# Altium PCB acqboard 3.0.PcbDoc (part 1 of 4)
Units mil, origin at the board's own origin, x right, y up, seen from the top; angles counter-clockwise.
Board outline 6000 x 4000 mil, 4 copper layers (Top Layer, Internal Plane 1, Internal Plane 2, Bottom Layer); 450 components, 328 nets, 1980 pads, 745 vias.
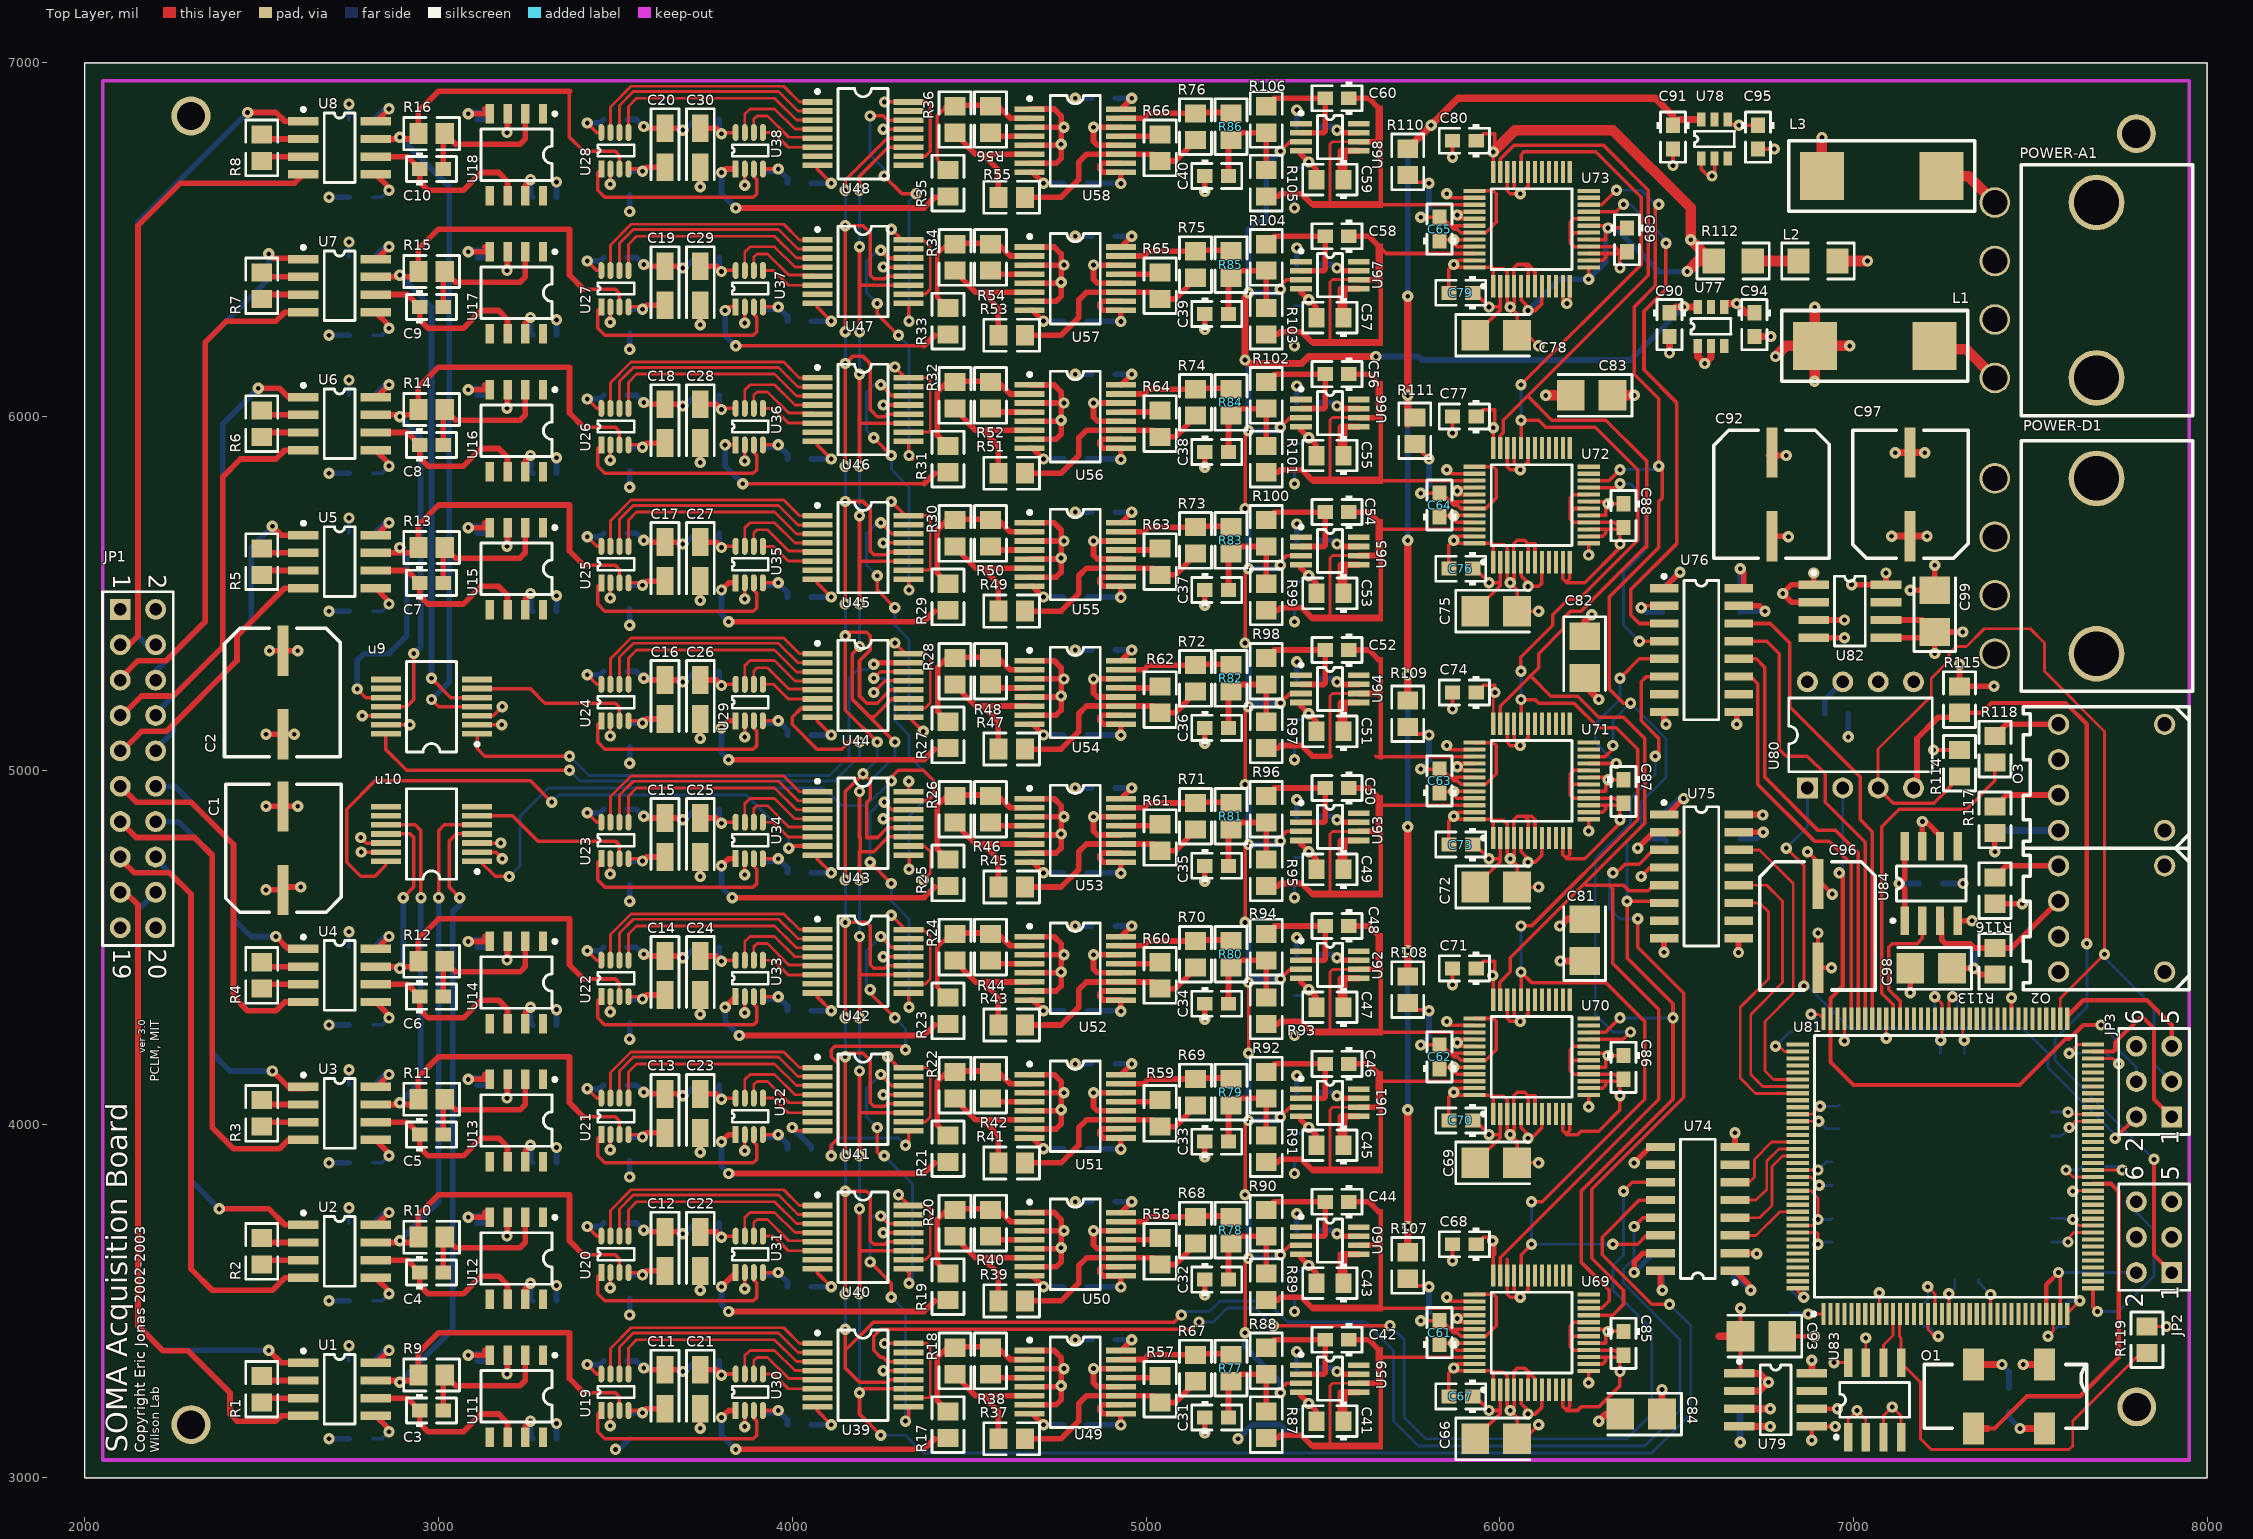
[diagram p0: Top Layer view]
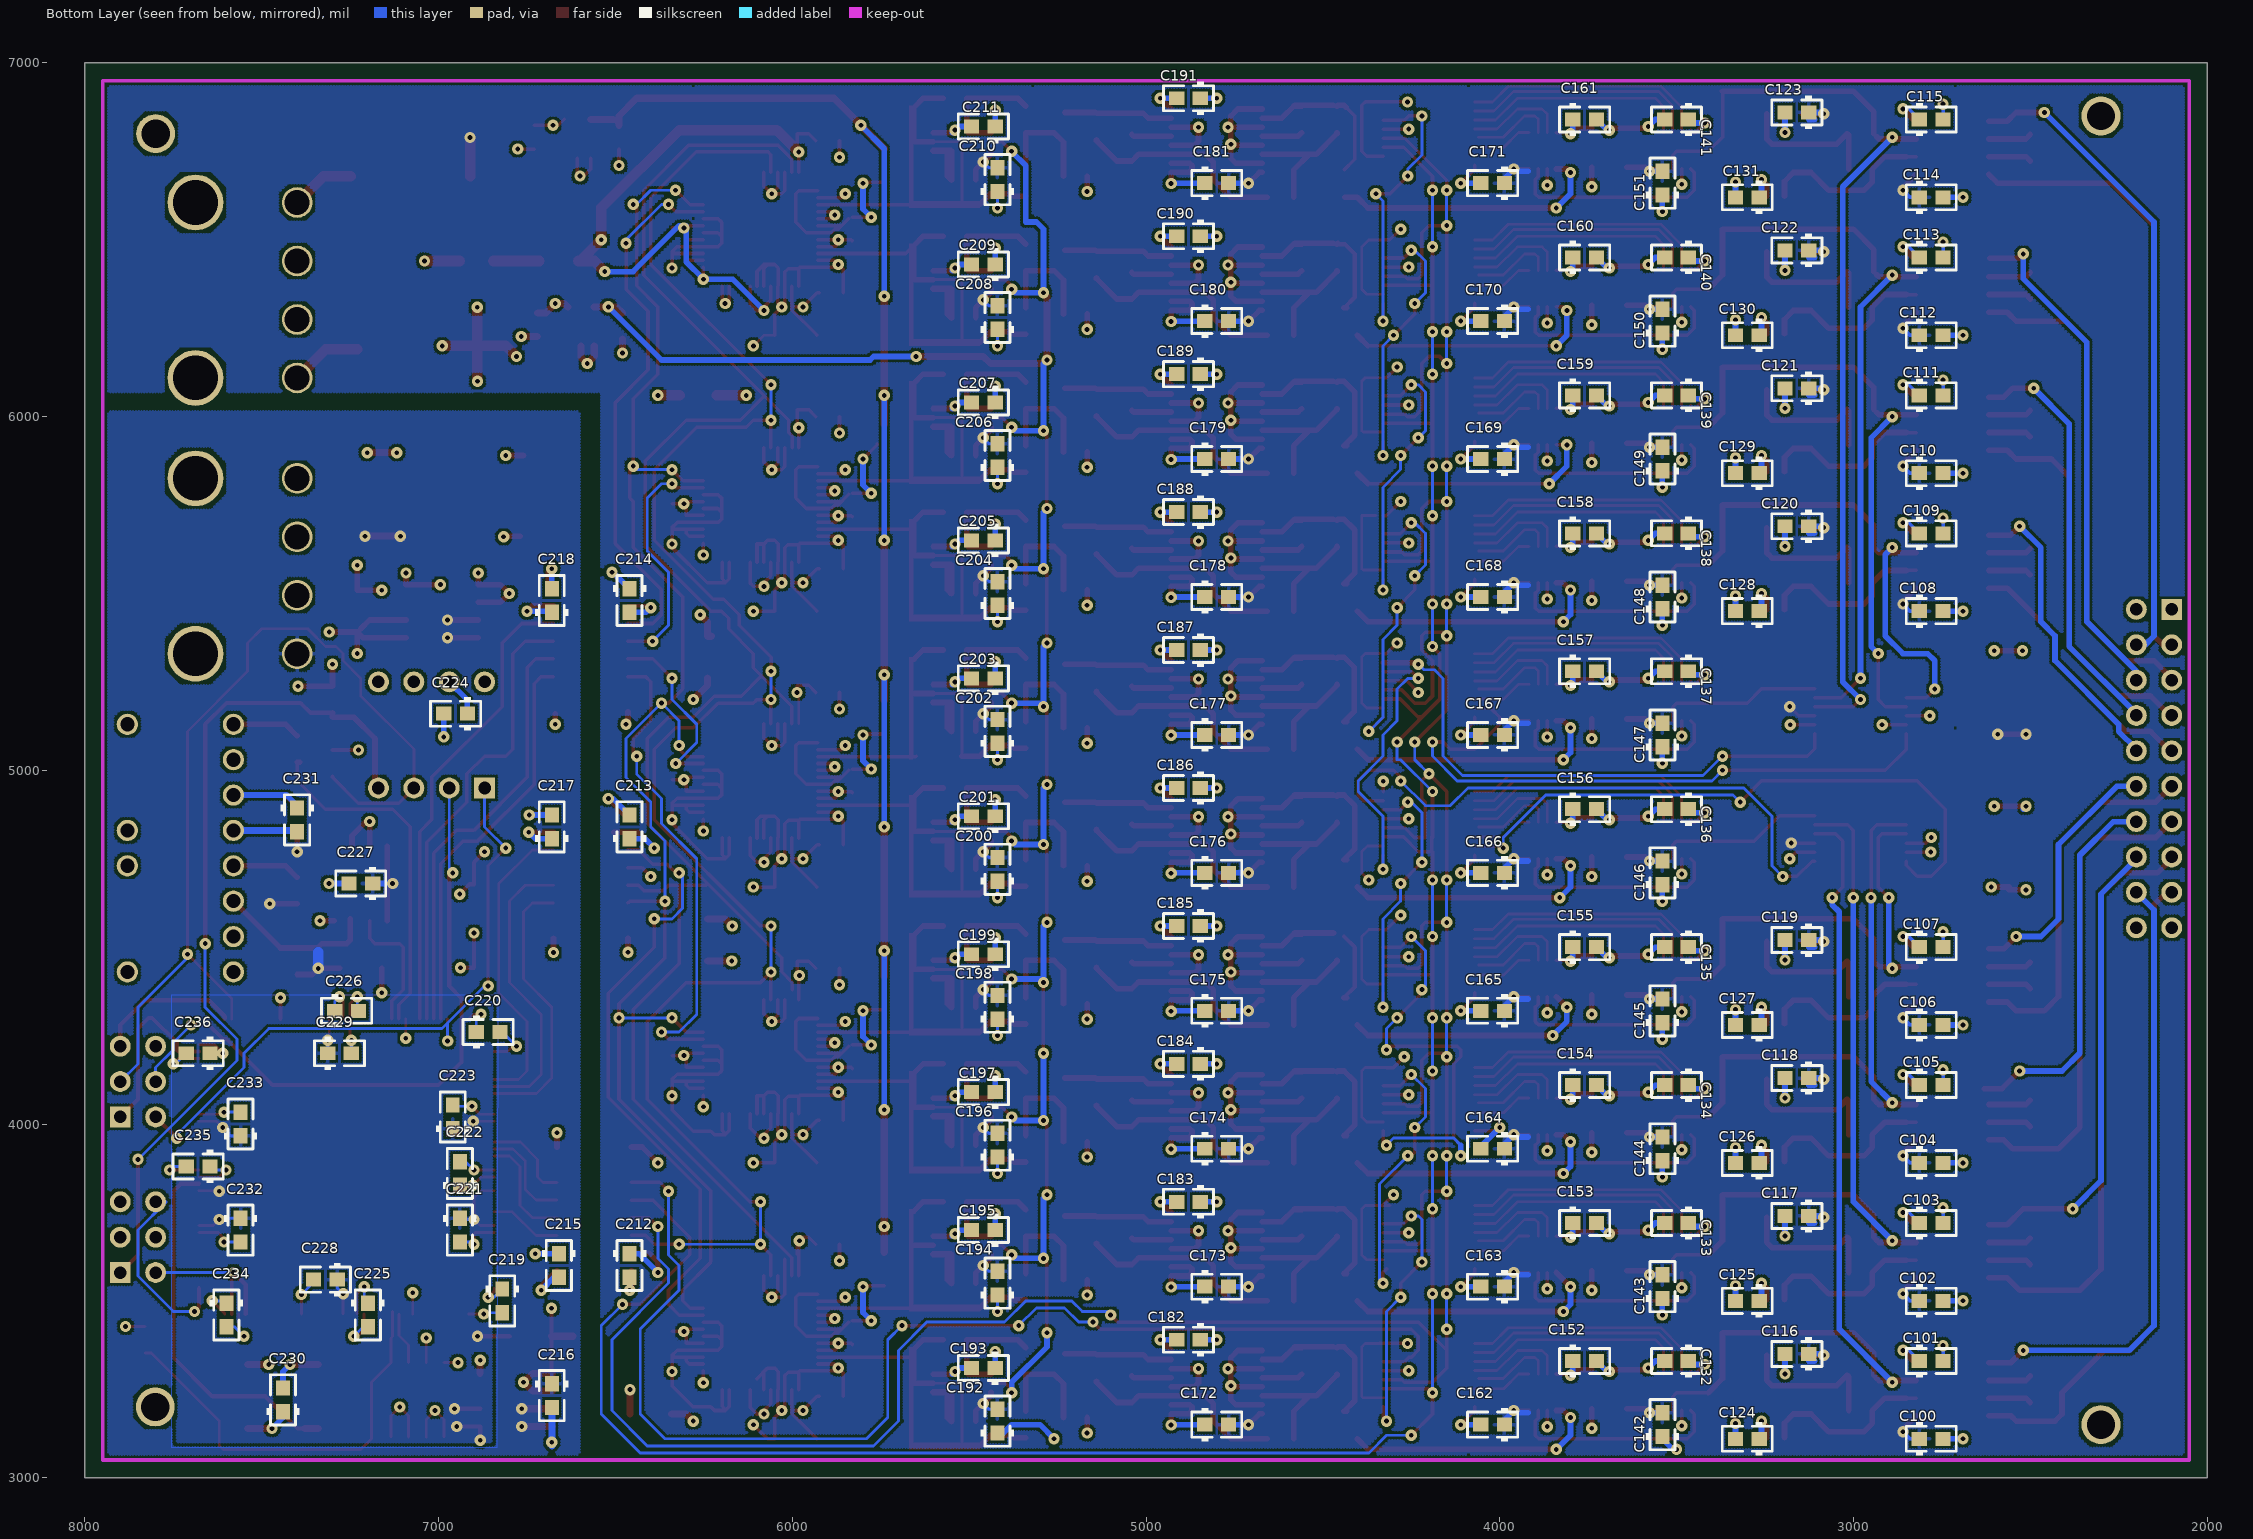
[diagram p1: Bottom Layer view, seen from below]
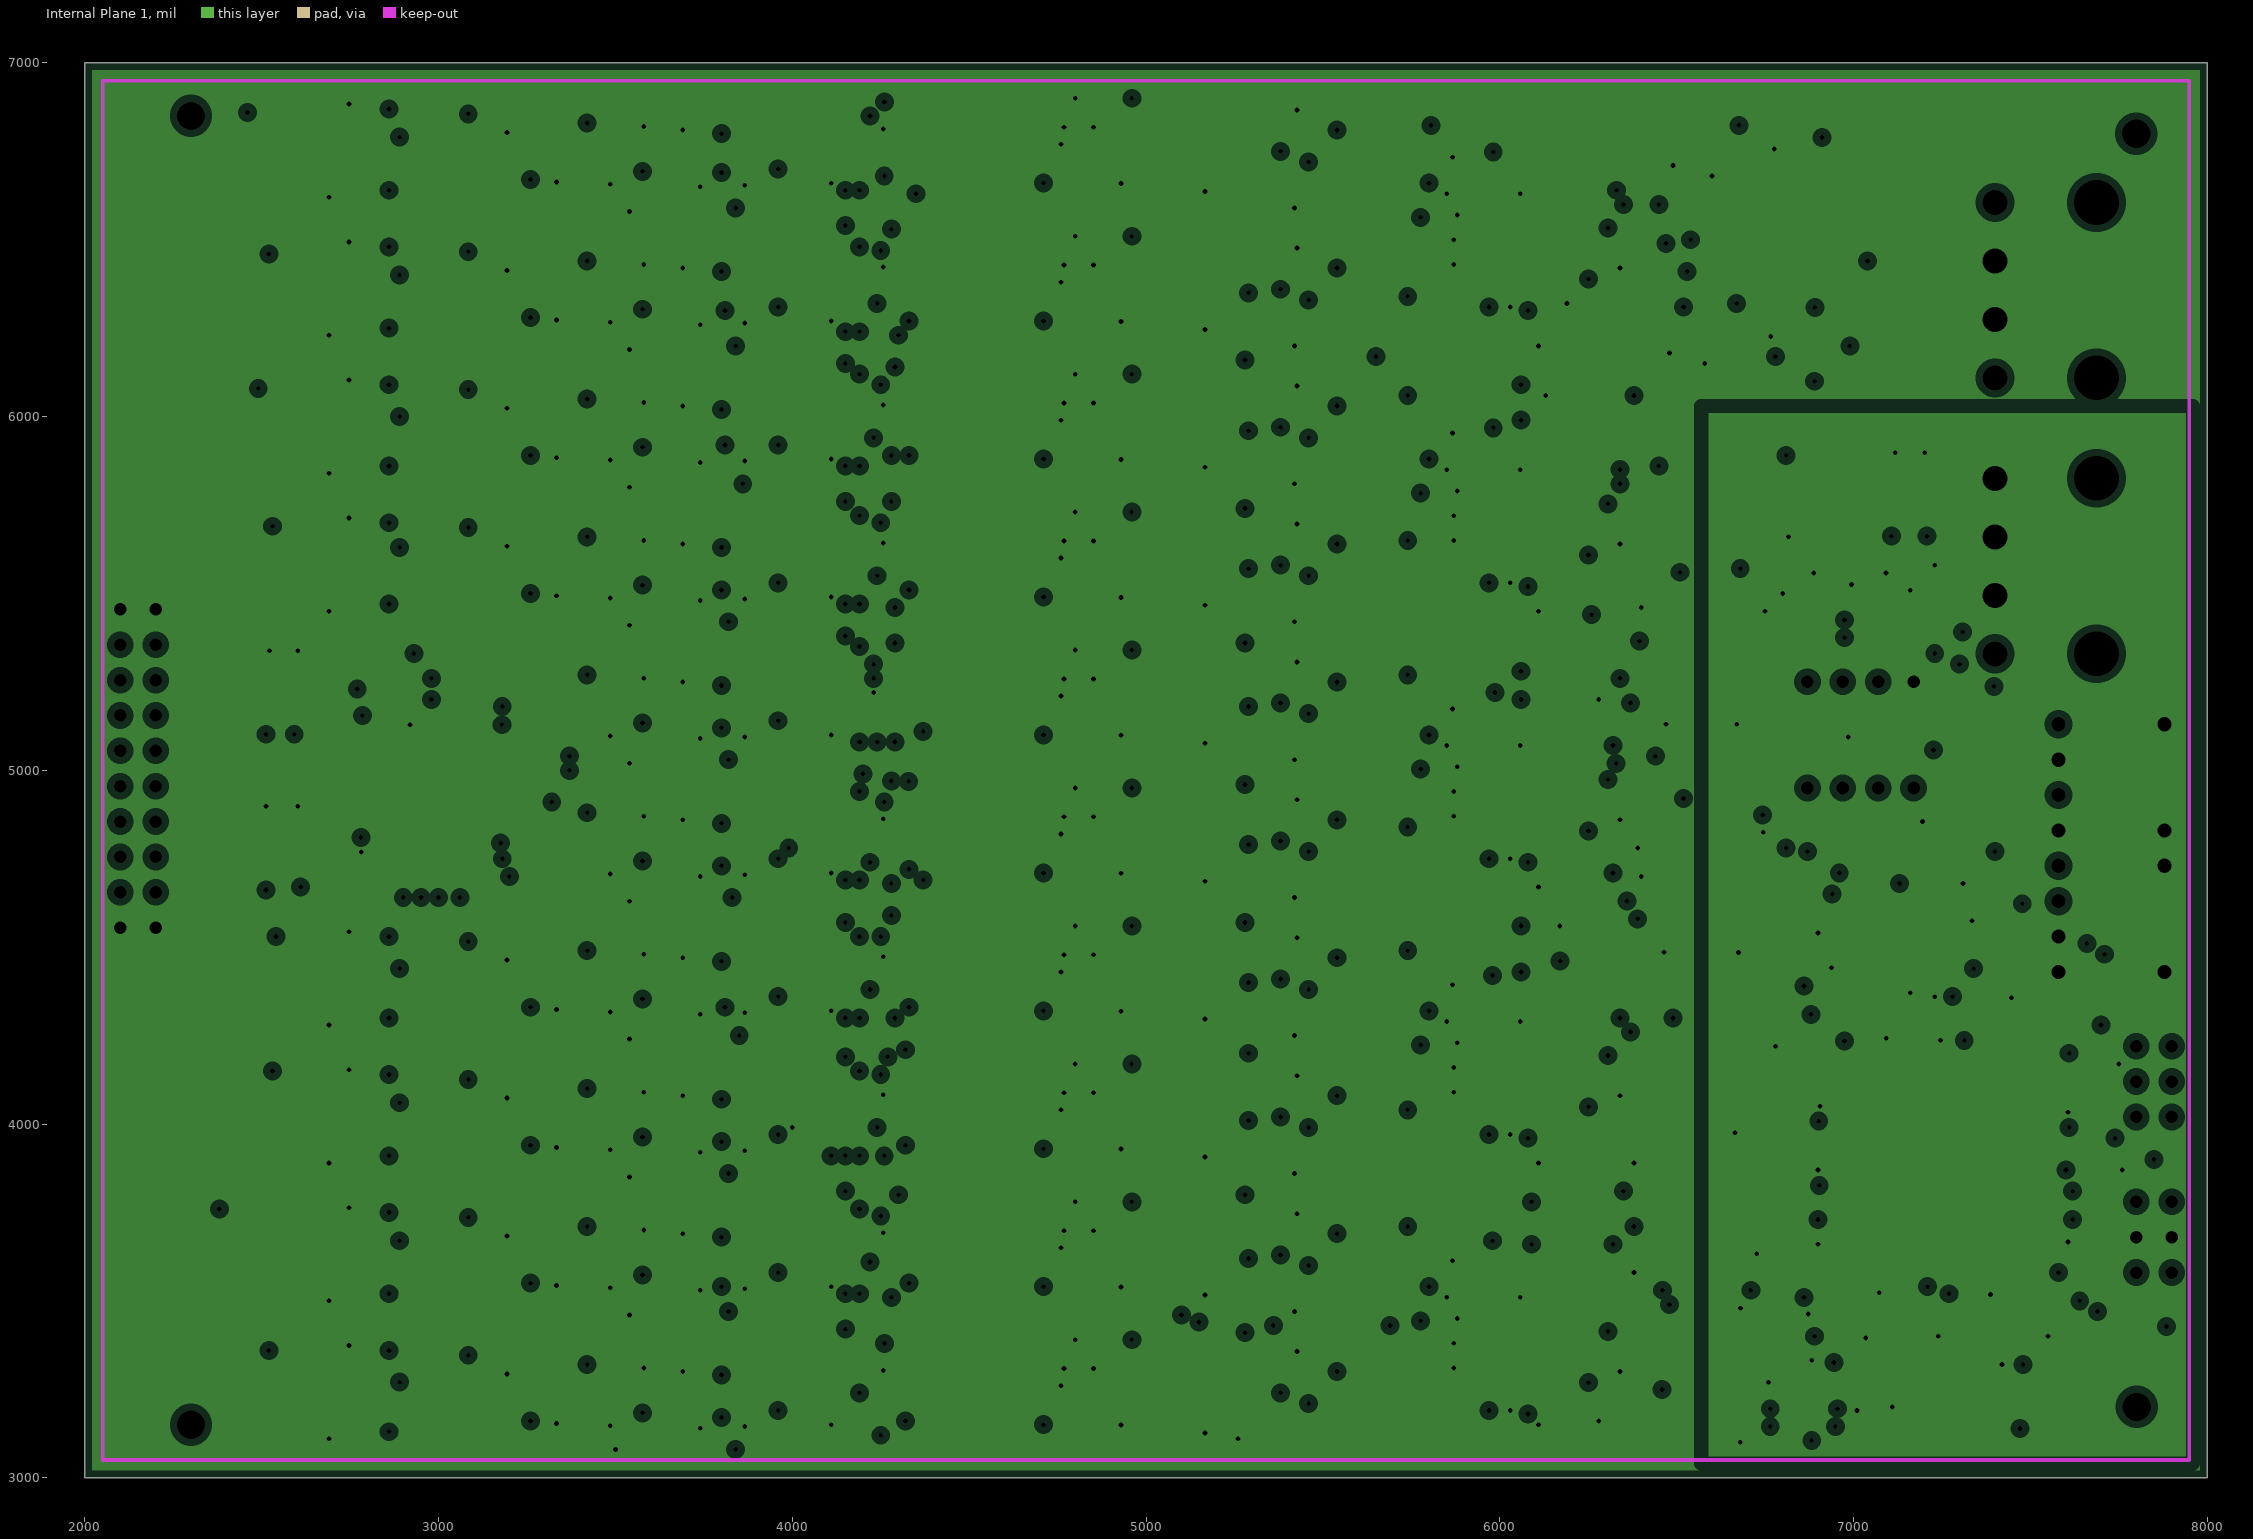
[diagram p2: Internal Plane 1, clearances drawn from the general rule]
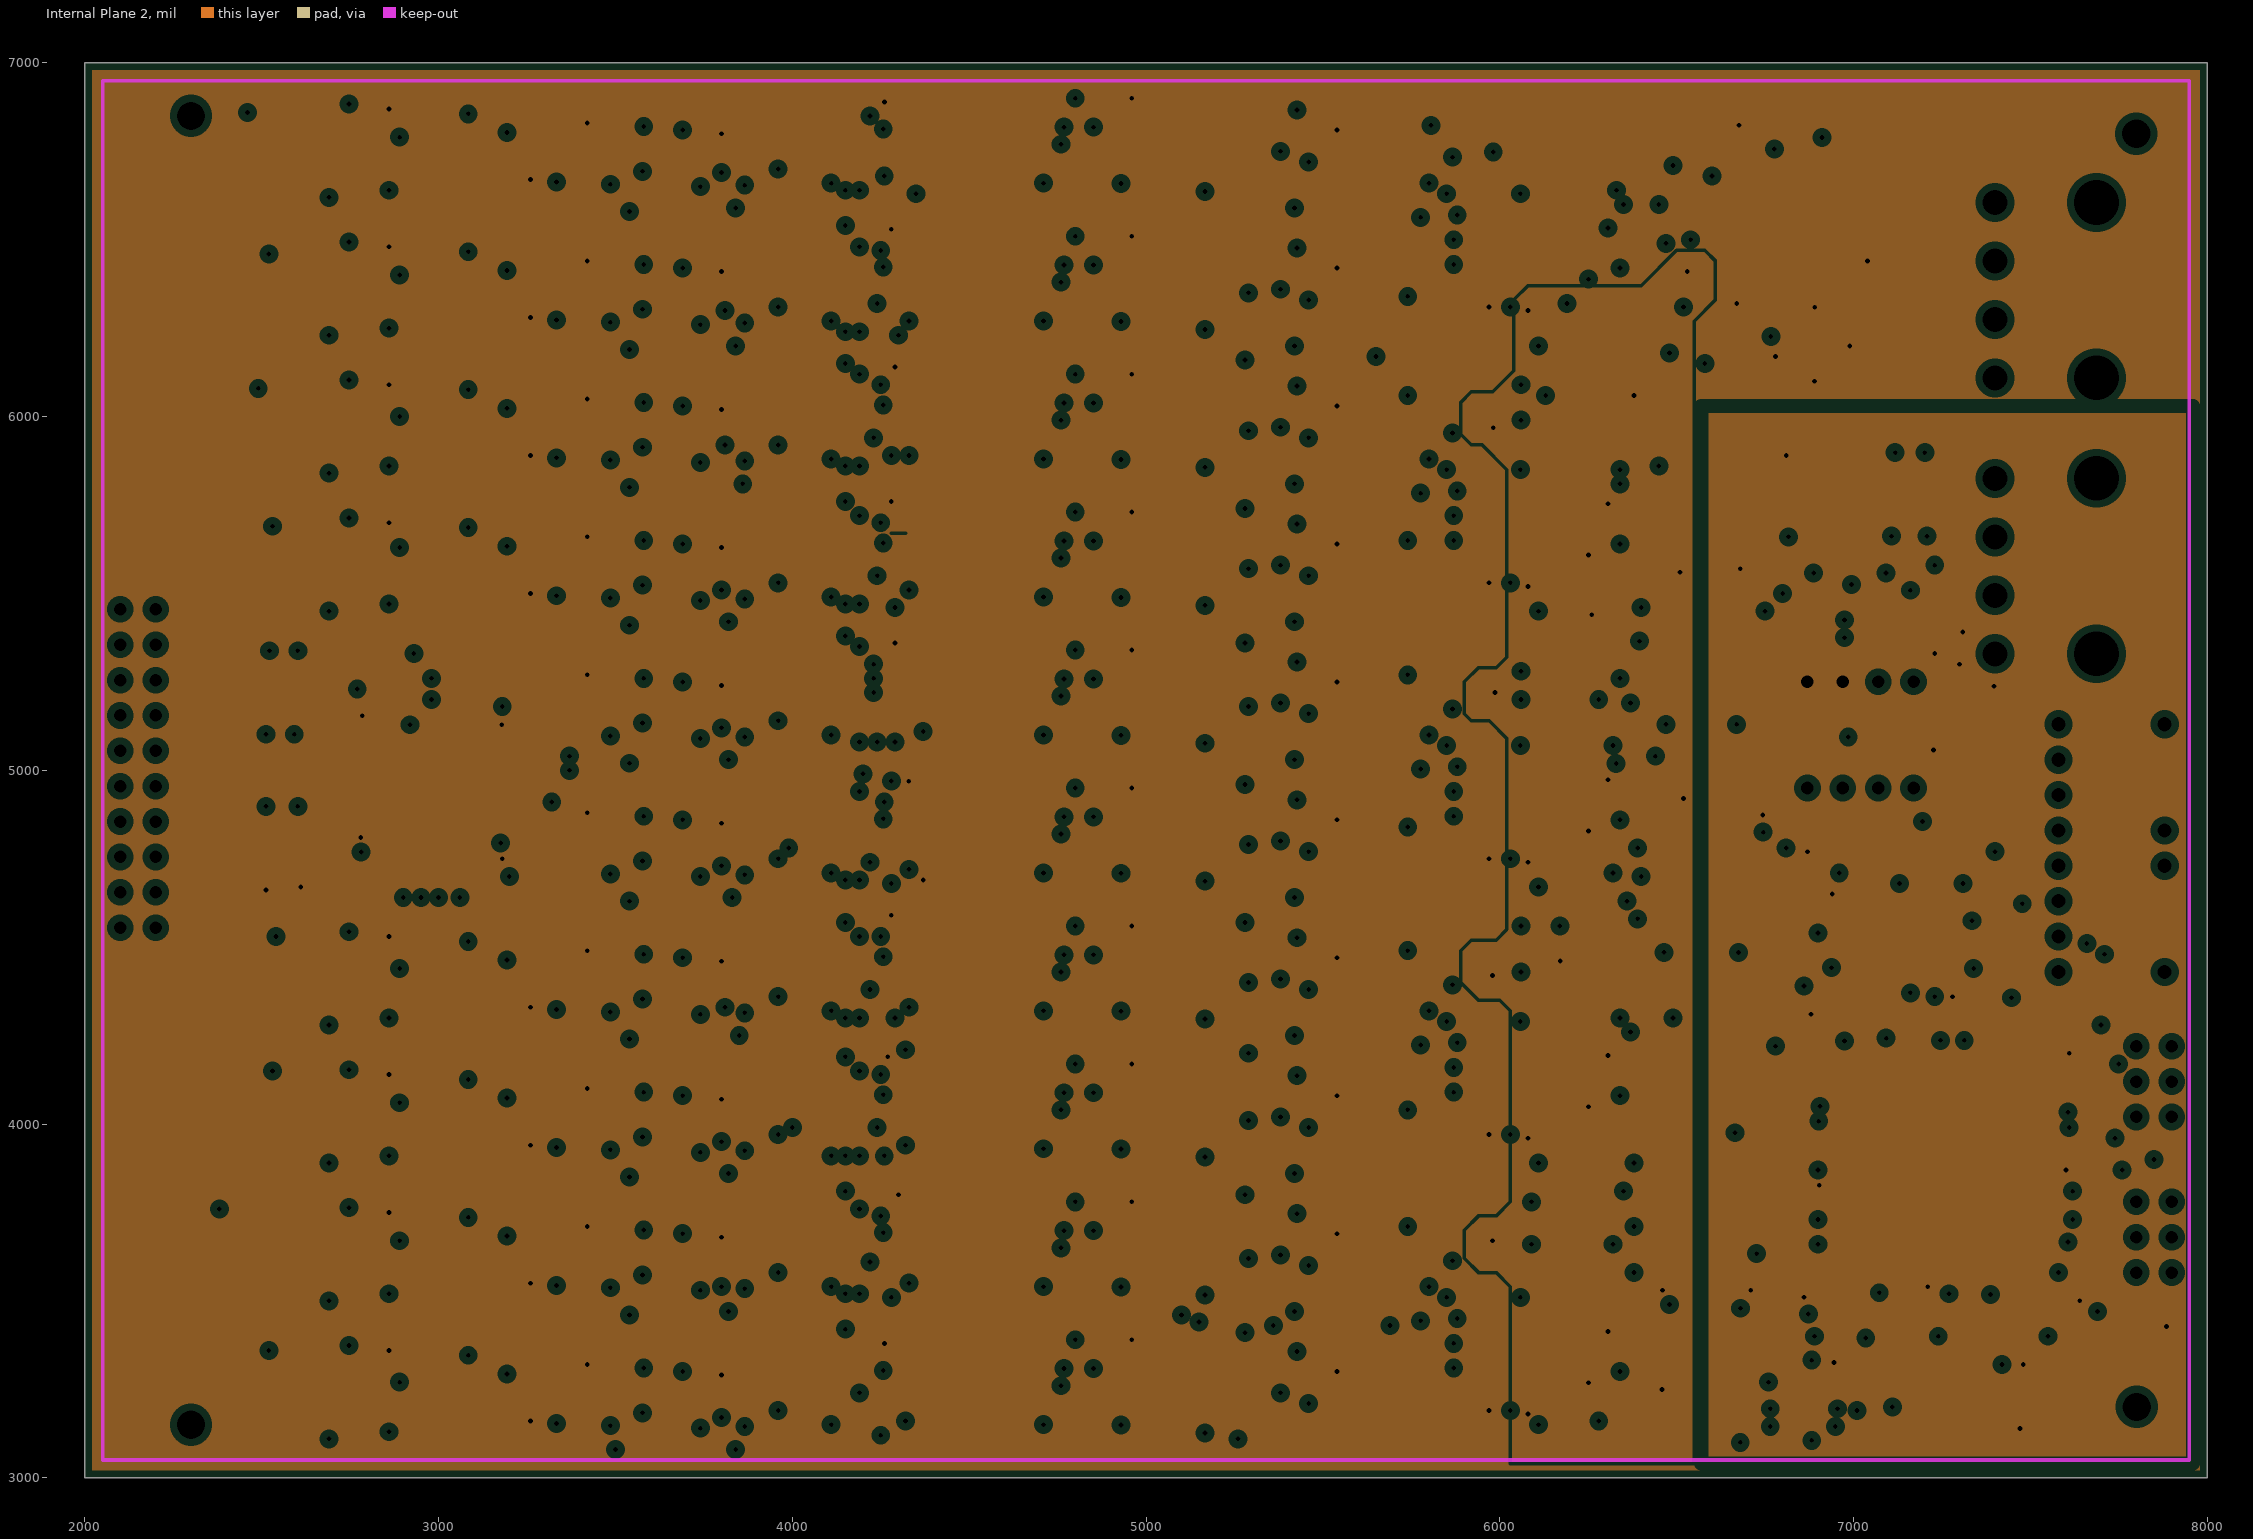
[diagram p3: Internal Plane 2, clearances drawn from the general rule]

## Layer stack, top to bottom
Top Layer: signal copper 1.4
Dielectric: core 12.6, FR-4, Dk 4.8
Internal Plane 1: plane copper 1.4, net AGND
Dielectric: prepreg 12.6, FR-4, Dk 4.8
Internal Plane 2: plane copper 1.4, net AVDD
Dielectric: core 12.6, FR-4, Dk 4.8
Bottom Layer: signal copper 1.4

## Board outline
2000,3000 8000,3000 8000,7000 2000,7000

## Design rules (kind name [scope] priority, off if disabled: settings)
Clearance [All] p1: gap=7
ComponentClearance [All] p1: gap=10 collisioncheckmode=0
HoleSize [All] p1: absolutevalues=TRUE maxlimit=180 minlimit=1 maxpercent=80.000 minpercent=20.000
PlaneClearance [All] p1: clearance=20
PlaneConnect [All] p1: planeconnectstyle=Relief reliefexpansion=20 reliefentries=4 reliefconductorwidth=10 reliefairgap=10
PolygonConnect [All] p1: connectstyle=Relief reliefconductorwidth=10 reliefentries=4 polygonreliefangle="90 Angle"
RoomDefinition isolation [InComponentClass('isolation')] p1: confinementstyle=ConfineIn formatcopy=TRUE outline 0,0 2000,0 2000,1000 0,1000
RoomDefinition FPGA [InComponentClass('FPGA')] p2: confinementstyle=ConfineIn formatcopy=TRUE outline 0,0 2000,0 2000,1000 0,1000
RoomDefinition ADC1 [InComponentClass('ADC1')] p3 off: confinementstyle=ConfineIn formatcopy=TRUE outline 5680,6170 6380,6170 6380,6950 5680,6950
RoomDefinition power [InComponentClass('power')] p4 off: confinementstyle=ConfineIn formatcopy=TRUE outline 6570,3050 6580,3050 7950,3050 7950,6030 6580,6030
RoomDefinition ADC5 [InComponentClass('ADC5')] p5 off: confinementstyle=ConfineIn formatcopy=TRUE outline 5680,3050 6380,3050 6380,3830 5680,3830
RoomDefinition ADC4 [InComponentClass('ADC4')] p6 off: confinementstyle=ConfineIn formatcopy=TRUE outline 5680,3830 6380,3830 6380,4610 5680,4610
RoomDefinition ADC3 [InComponentClass('ADC3')] p7 off: confinementstyle=ConfineIn formatcopy=TRUE outline 5680,4610 6380,4610 6380,5390 5680,5390
RoomDefinition ADC2 [InComponentClass('ADC2')] p8 off: confinementstyle=ConfineIn formatcopy=TRUE outline 5680,5390 6380,5390 6380,6170 5680,6170
RoomDefinition AA10 [InComponentClass('AA10')] p9 off: confinementstyle=ConfineIn formatcopy=TRUE outline 4330,3050 5680,3050 5680,3440 4330,3440
RoomDefinition AA9 [InComponentClass('AA9')] p10 off: confinementstyle=ConfineIn formatcopy=TRUE outline 4330,3440 5680,3440 5680,3830 4330,3830
RoomDefinition AA8 [InComponentClass('AA8')] p11 off: confinementstyle=ConfineIn formatcopy=TRUE outline 4330,3830 5680,3830 5680,4220 4330,4220
RoomDefinition AA7 [InComponentClass('AA7')] p12 off: confinementstyle=ConfineIn formatcopy=TRUE outline 4330,4220 5680,4220 5680,4610 4330,4610
RoomDefinition AA6 [InComponentClass('AA6')] p13 off: confinementstyle=ConfineIn formatcopy=TRUE outline 4330,4610 5680,4610 5680,5000 4330,5000
RoomDefinition AA5 [InComponentClass('AA5')] p14 off: confinementstyle=ConfineIn formatcopy=TRUE outline 4330,5000 5680,5000 5680,5390 4330,5390
RoomDefinition AA4 [InComponentClass('AA4')] p15 off: confinementstyle=ConfineIn formatcopy=TRUE outline 4330,5390 5680,5390 5680,5780 4330,5780
RoomDefinition AA3 [InComponentClass('AA3')] p16 off: confinementstyle=ConfineIn formatcopy=TRUE outline 4330,5780 5680,5780 5680,6170 4330,6170
RoomDefinition AA2 [InComponentClass('AA2')] p17 off: confinementstyle=ConfineIn formatcopy=TRUE outline 4330,6170 5680,6170 5680,6560 4330,6560
RoomDefinition PGA5 [InComponentClass('PGA5')] p18 off: confinementstyle=ConfineIn formatcopy=TRUE outline 3390,5000 4410,5000 4410,5390 3390,5390
RoomDefinition PGA9 [InComponentClass('PGA9')] p19 off: confinementstyle=ConfineIn formatcopy=TRUE outline 3390,3440 4410,3440 4410,3830 3390,3830
RoomDefinition PGA2 [InComponentClass('PGA2')] p20 off: confinementstyle=ConfineIn formatcopy=TRUE outline 3390,6170 4410,6170 4410,6560 3390,6560
RoomDefinition PGA10 [InComponentClass('PGA10')] p21 off: confinementstyle=ConfineIn formatcopy=TRUE outline 3390,3050 4410,3050 4410,3440 3390,3440
RoomDefinition PGA8 [InComponentClass('PGA8')] p22 off: confinementstyle=ConfineIn formatcopy=TRUE outline 3390,3830 4410,3830 4410,4220 3390,4220
RoomDefinition PGA7 [InComponentClass('PGA7')] p23 off: confinementstyle=ConfineIn formatcopy=TRUE outline 3390,4220 4410,4220 4410,4610 3390,4610
RoomDefinition PGA6 [InComponentClass('PGA6')] p24 off: confinementstyle=ConfineIn formatcopy=TRUE outline 3390,4610 4410,4610 4410,5000 3390,5000
RoomDefinition PGA4 [InComponentClass('PGA4')] p25 off: confinementstyle=ConfineIn formatcopy=TRUE outline 3390,5390 4410,5390 4410,5780 3390,5780
RoomDefinition PGA3 [InComponentClass('PGA3')] p26 off: confinementstyle=ConfineIn formatcopy=TRUE outline 3390,5780 4410,5780 4410,6170 3390,6170
RoomDefinition PGA1 [InComponentClass('PGA1')] p27 off: confinementstyle=ConfineIn formatcopy=TRUE outline 3390,6560 4410,6560 4410,6950 3390,6950
RoomDefinition IN1 [InComponentClass('IN1')] p28 off: confinementstyle=ConfineIn formatcopy=TRUE outline 2400,6560 3380,6560 3380,6950 2400,6950
RoomDefinition AA1 [InComponentClass('AA1')] p29 off: confinementstyle=ConfineIn formatcopy=TRUE outline 4330,6560 5680,6560 5680,6950 4330,6950
RoomDefinition IN2 [InComponentClass('IN2')] p30 off: confinementstyle=ConfineIn formatcopy=TRUE outline 2400,6170 3380,6170 3380,6560 2400,6560
RoomDefinition IN3 [InComponentClass('IN3')] p31 off: confinementstyle=ConfineIn formatcopy=TRUE outline 2400,5780 3380,5780 3380,6170 2400,6170
RoomDefinition IN4 [InComponentClass('IN4')] p32 off: confinementstyle=ConfineIn formatcopy=TRUE outline 2400,5390 3380,5390 3380,5780 2400,5780
RoomDefinition IN5 [InComponentClass('IN5')] p33 off: confinementstyle=ConfineIn formatcopy=TRUE outline 2400,4220 3380,4220 3380,4610 2400,4610
RoomDefinition IN6 [InComponentClass('IN6')] p34 off: confinementstyle=ConfineIn formatcopy=TRUE outline 2400,3830 3380,3830 3380,4220 2400,4220
RoomDefinition IN7 [InComponentClass('IN7')] p35 off: confinementstyle=ConfineIn formatcopy=TRUE outline 2400,3440 3380,3440 3380,3830 2400,3830
RoomDefinition IN8 [InComponentClass('IN8')] p36 off: confinementstyle=ConfineIn formatcopy=TRUE outline 2400,3050 3380,3050 3380,3440 2400,3440
RoomDefinition inmux1 [InComponentClass('inmux1')] p37 off: confinementstyle=ConfineIn formatcopy=TRUE outline 2790,4610 3370,4610 3370,5000 2790,5000
RoomDefinition inmux2 [InComponentClass('inmux2')] p38 off: confinementstyle=ConfineIn formatcopy=TRUE outline 2790,5000 3368.82,5000 3368.82,5390 2790,5390
RoomDefinition main [InComponentClass('main')] p39 off: confinementstyle=ConfineIn formatcopy=TRUE outline 2000,4420 2420,4420 2420,5680 2000,5680
RoutingLayers [All] p1: top layer=Horizontal bottom layer=Vertical
RoutingVias [All] p1: holewidth=13.5 width=32 viastyle="Through Hole" minholewidth=13.5 minwidth=32 maxholewidth=28 maxwidth=128
SolderMaskExpansion [All] p1: expansion=4
TestPointUsage [All] p1: valid=0 allowmultiple=FALSE
Testpoint [All] p1: side=15 testpointundercomponent=TRUE minsize=40 maxsize=100 preferedsize=60 minholesize=0 maxholesize=40 preferedholesize=32 testpointgrid=1 style=1023 order=-539222988
Width [All] p1: maxlimit=40 minlimit=7 preferedwidth=34798.61 toplayer_prefwidth=10 bottomlayer_prefwidth=10 minimp=50.000000 maximp=50.000000 favimp=50.000000
13 further rules are at their usual default settings.

## Classes and differential pairs
component class AA1: C40 C59 C60 C181 C191 C210 C211 R35 R36 R55 R56 R66 R76 R86 R105 R106 U58 U68
component class ADC1: C65 C78 C79 C80 C89 R110 U73
component class ADC2: C64 C75 C76 C77 C88 R111 U72
component class ADC3: C63 C72 C73 C74 C87 R109 U71
component class ADC4: C62 C69 C70 C71 C86 R108 U70
component class ADC5: C61 C66 C67 C68 C85 R107 U69
component class FPGA: C92 C96 C98 C219 C220 C221 C222 C223 C224 C225 C226 C227 C228 C229 C230 C231 C232 C233 C234 C235 C236 JP2 JP3 O1 O2 O3 R113 R114 R115 R116 R117 R118 R119 U80 U81 U83 U84
component class IN1: C10 C114 C115 C123 C131 R8 R16 U8 U18
component class IN2: C9 C112 C113 C122 C130 R7 R15 U7 U17
component class IN3: C8 C110 C111 C121 C129 R6 R14 U6 U16
component class IN4: C7 C108 C109 C120 C128 R5 R13 U5 U15
component class IN5: C6 C106 C107 C119 C127 R4 R12 U4 U14
component class IN6: C5 C104 C105 C118 C126 R3 R11 U3 U13
component class IN7: C4 C102 C103 C117 C125 R2 R10 U2 U12
component class IN8: C3 C100 C101 C116 C124 R1 R9 U1 U11
component class PGA1: C20 C30 C141 C151 C161 C171 U28 U38 U48
component class PGA2: C19 C29 C140 C150 C160 C170 U27 U37 U47
component class PGA3: C18 C28 C139 C149 C159 C169 U26 U36 U46
component class PGA4: C17 C27 C138 C148 C158 C168 U25 U35 U45
component class PGA5: C16 C26 C137 C147 C157 C167 U24 U29 U44
component class PGA6: C15 C25 C136 C146 C156 C166 U23 U34 U43
component class PGA7: C14 C24 C135 C145 C155 C165 U22 U33 U42
component class PGA8: C13 C23 C134 C144 C154 C164 U21 U32 U41
component class PGA9: C12 C22 C133 C143 C153 C163 U20 U31 U40
component class PGA10: C11 C21 C132 C142 C152 C162 U19 U30 U39
component class inmux1: u10
component class inmux2: u9
component class isolation: C212 C213 C214 C215 C217 C218 U74 U75 U76
component class main: JP1
component class power: C1 C2 C81 C82 C83 C84 C90 C91 C93 C94 C95 C97 C99 C216 L1 L2 L3 POWER-A1 POWER-D1 R112 U77 U78 U79 U82
net class AAIN[1..10]: AAIN1 AAIN2 AAIN3 AAIN4 AAIN5 AAIN6 AAIN7 AAIN8 AAIN9 AAIN10
net class IN+[1..8]: IN+1 IN+2 IN+3 IN+4 IN+5 IN+6 IN+7 IN+8
net class IN-[1..8]: IN-1 IN-2 IN-3 IN-4 IN-5 IN-6 IN-7 IN-8
net class INAOUT[1..8]: INAOUT1 INAOUT2 INAOUT3 INAOUT4 INAOUT7 INAOUT8 INAOUT9 INAOUT10
net class INMUXA[1..10]: INMUXA1 INMUXA2 INMUXA3 INMUXA4 INMUXA5 INMUXA6 INMUXA7 INMUXA8 INMUXA9 INMUXA10
net class INMUXB[1..10]: INMUXB1 INMUXB2 INMUXB3 INMUXB4 INMUXB5 INMUXB6 INMUXB7 INMUXB8 INMUXB9 INMUXB10
net class SDOUT[1..5]: SDOUT1 SDOUT2 SDOUT3 SDOUT4 SDOUT5
net class SERIN[1..10]: SERIN2 SERIN3 SERIN4 SERIN5 SERIN6 SERIN7 SERIN8 SERIN9 SERIN10
channel class ADC: ADC1 ADC2 ADC3 ADC4 ADC5
channel class PGA: PGA1 PGA2 PGA3 PGA4 PGA5 PGA6 PGA7 PGA8 PGA9 PGA10
channel class aafilter: AA1 AA2 AA3 AA4 AA5 AA6 AA7 AA8 AA9 AA10
channel class inmux: inmux1 inmux2
channel class input: IN1 IN2 IN3 IN4 IN5 IN6 IN7 IN8
net class PGAIN[1..10]: PGAIN5 PGAIN6
component class AA2: C39 C57 C58 C180 C190 C208 C209 R33 R34 R53 R54 R65 R75 R85 R103 R104 U57 U67
component class AA3: C38 C55 C56 C179 C189 C206 C207 R31 R32 R51 R52 R64 R74 R84 R101 R102 U56 U66
component class AA4: C37 C53 C54 C178 C188 C204 C205 R29 R30 R49 R50 R63 R73 R83 R99 R100 U55 U65
component class AA5: C36 C51 C52 C177 C187 C202 C203 R27 R28 R47 R48 R62 R72 R82 R97 R98 U54 U64
component class AA6: C35 C49 C50 C176 C186 C200 C201 R25 R26 R45 R46 R61 R71 R81 R95 R96 U53 U63
component class AA7: C34 C47 C48 C175 C185 C198 C199 R23 R24 R43 R44 R60 R70 R80 R93 R94 U52 U62
component class AA8: C33 C45 C46 C174 C184 C196 C197 R21 R22 R41 R42 R59 R69 R79 R91 R92 U51 U61
component class AA9: C32 C43 C44 C173 C183 C194 C195 R19 R20 R39 R40 R58 R68 R78 R89 R90 U50 U60
component class AA10: C31 C41 C42 C172 C182 C192 C193 R17 R18 R37 R38 R57 R67 R77 R87 R88 U49 U59
net class AAOUT[1..10]: AAOUT1 AAOUT2 AAOUT3 AAOUT4 AAOUT5
net class SEROUT[1..10]: SEROUT1

## Components (designator, comment, footprint, x,y, rotation, side; value= is the part's Value field where it differs from the comment)
C1 "" PanasonicE 2560,4780 r270 top (schematic designator C77)
C2 "" PanasonicE 2560,5220 r90 top (schematic designator C78)
C3 "Cap" CC1608-0603 2980,3190 r0 top (schematic designator C50)
C4 "Cap" CC1608-0603 2980,3580 r0 top (schematic designator C50)
C5 "Cap" CC1608-0603 2980,3970 r0 top (schematic designator C50)
C6 "Cap" CC1608-0603 2980,4360 r0 top (schematic designator C50)
C7 "Cap" CC1608-0603 2980,5530 r0 top (schematic designator C50)
C8 "Cap" CC1608-0603 2980,5920 r0 top (schematic designator C50)
C9 "Cap" CC1608-0603 2980,6310 r0 top (schematic designator C50)
C10 "Cap" CC1608-0603 2980,6700 r0 top (schematic designator C50)
C11 "Tantalum" TC3216-1206 3640,3250 r270 top (schematic designator C39)
C12 "Tantalum" TC3216-1206 3640,3640 r270 top (schematic designator C39)
C13 "Tantalum" TC3216-1206 3640,4030 r270 top (schematic designator C39)
C14 "Tantalum" TC3216-1206 3640,4420 r270 top (schematic designator C39)
C15 "Tantalum" TC3216-1206 3640,4810 r270 top (schematic designator C39)
C16 "Tantalum" TC3216-1206 3640,5200 r270 top (schematic designator C39)
C17 "Tantalum" TC3216-1206 3640,5590 r270 top (schematic designator C39)
C18 "Tantalum" TC3216-1206 3640,5980 r270 top (schematic designator C39)
C19 "Tantalum" TC3216-1206 3640,6370 r270 top (schematic designator C39)
C20 "Tantalum" TC3216-1206 3640,6760 r270 top (schematic designator C39)
C21 "Tantalum" TC3216-1206 3740,3250 r270 top (schematic designator C38)
C22 "Tantalum" TC3216-1206 3740,3640 r270 top (schematic designator C38)
C23 "Tantalum" TC3216-1206 3740,4030 r270 top (schematic designator C38)
C24 "Tantalum" TC3216-1206 3740,4420 r270 top (schematic designator C38)
C25 "Tantalum" TC3216-1206 3740,4810 r270 top (schematic designator C38)
C26 "Tantalum" TC3216-1206 3740,5200 r270 top (schematic designator C38)
C27 "Tantalum" TC3216-1206 3740,5590 r270 top (schematic designator C38)
C28 "Tantalum" TC3216-1206 3740,5980 r270 top (schematic designator C38)
C29 "Tantalum" TC3216-1206 3740,6370 r270 top (schematic designator C38)
C30 "Tantalum" TC3216-1206 3740,6760 r270 top (schematic designator C38)
C31 "Cap" CC1608-0603 5200,3170 r0 top (schematic designator C44)
C32 "Cap" CC1608-0603 5200,3560 r0 top (schematic designator C44)
C33 "Cap" CC1608-0603 5200,3950 r0 top (schematic designator C44)
C34 "Cap" CC1608-0603 5200,4340 r0 top (schematic designator C44)
C35 "Cap" CC1608-0603 5200,4730 r0 top (schematic designator C44)
C36 "Cap" CC1608-0603 5200,5120 r0 top (schematic designator C44)
C37 "Cap" CC1608-0603 5200,5510 r0 top (schematic designator C44)
C38 "Cap" CC1608-0603 5200,5900 r0 top (schematic designator C44)
C39 "Cap" CC1608-0603 5200,6290 r0 top (schematic designator C44)
C40 "Cap" CC1608-0603 5200,6680 r0 top (schematic designator C44)
C41 "CComp NPO" CC2013-0805 5520,3160 r180 top (schematic designator C47)
C42 "Cap" CC1608-0603 5540,3390 r180 top
C43 "CComp NPO" CC2013-0805 5520,3550 r180 top (schematic designator C47)
C44 "Cap" CC1608-0603 5540,3780 r180 top (schematic designator C42)
C45 "CComp NPO" CC2013-0805 5520,3940 r180 top (schematic designator C47)
C46 "Cap" CC1608-0603 5540,4170 r180 top (schematic designator C42)
C47 "CComp NPO" CC2013-0805 5520,4330 r180 top
C48 "Cap" CC1608-0603 5540,4560 r180 top (schematic designator C42)
C49 "CComp NPO" CC2013-0805 5520,4720 r180 top (schematic designator C47)
C50 "Cap" CC1608-0603 5540,4950 r180 top (schematic designator C42)
C51 "CComp NPO" CC2013-0805 5520,5110 r180 top (schematic designator C47)
C52 "Cap" CC1608-0603 5540,5340 r180 top (schematic designator C42)
C53 "CComp NPO" CC2013-0805 5520,5500 r180 top (schematic designator C47)
C54 "Cap" CC1608-0603 5540,5730 r180 top (schematic designator C42)
C55 "CComp NPO" CC2013-0805 5520,5890 r180 top (schematic designator C47)
C56 "Cap" CC1608-0603 5540,6120 r180 top (schematic designator C42)
C57 "CComp NPO" CC2013-0805 5520,6280 r180 top (schematic designator C47)
C58 "Cap" CC1608-0603 5540,6510 r180 top (schematic designator C42)
C59 "CComp NPO" CC2013-0805 5520,6670 r180 top (schematic designator C47)
C60 "Cap" CC1608-0603 5540,6900 r180 top (schematic designator C42)
C61 "Cap" CC1608-0603 5830,3410 r90 top (schematic designator C2)
C62 "Cap" CC1608-0603 5830,4190 r90 top (schematic designator C2)
C63 "Cap" CC1608-0603 5830,4970 r90 top (schematic designator C2)
C64 "Cap" CC1608-0603 5830,5750 r90 top (schematic designator C2)
C65 "Cap" CC1608-0603 5830,6530 r90 top (schematic designator C2)
C66 "low ESR" TC3528-1411 5990,3110 r0 top (schematic designator C5)
C67 "Cap" CC1608-0603 5890,3230 r180 top (schematic designator C1)
C68 "Cap" CC1608-0603 5900,3660 r180 top (schematic designator C3)
C69 "low ESR" TC3528-1411 5990,3890 r0 top (schematic designator C5)
C70 "Cap" CC1608-0603 5890,4010 r180 top (schematic designator C1)
C71 "Cap" CC1608-0603 5900,4440 r180 top (schematic designator C3)
C72 "low ESR" TC3528-1411 5990,4670 r0 top (schematic designator C5)
C73 "Cap" CC1608-0603 5890,4790 r180 top (schematic designator C1)
C74 "Cap" CC1608-0603 5900,5220 r180 top (schematic designator C3)
C75 "low ESR" TC3528-1411 5990,5450 r0 top (schematic designator C5)
C76 "Cap" CC1608-0603 5890,5570 r180 top (schematic designator C1)
C77 "Cap" CC1608-0603 5900,6000 r180 top (schematic designator C3)
C78 "low ESR" TC3528-1411 5990,6230 r0 top (schematic designator C5)
C79 "Cap" CC1608-0603 5890,6350 r180 top (schematic designator C1)
C80 "Cap" CC1608-0603 5900,6780 r180 top (schematic designator C3)
C81 "low ESR" TC3528-1411 6240,4520 r90 top (schematic designator C16)
C82 "low ESR" TC3528-1411 6240,5320 r270 top (schematic designator C17)
C83 "low ESR" TC3528-1411 6260,6060 r180 top (schematic designator C67)
C84 "low ESR" TC3528-1411 6400,3180 r180 top (schematic designator C15)
C85 "Cap" CC1608-0603 6350,3380 r270 top (schematic designator C4)
C86 "Cap" CC1608-0603 6350,4160 r270 top (schematic designator C4)
C87 "Cap" CC1608-0603 6350,4940 r270 top (schematic designator C4)
C88 "Cap" CC1608-0603 6350,5720 r270 top (schematic designator C4)
C89 "Cap" CC1608-0603 6360,6500 r270 top (schematic designator C4)
C90 "Cap" CC1608-0603 6480,6260 r270 top (schematic designator C69)
C91 "Cap" CC1608-0603 6490,6790 r270 top (schematic designator C64)
C92 "" PanasonicE 6770,5780 r90 top (schematic designator C73)
C93 "low ESR" TC3528-1411 6740,3400 r180 top (schematic designator C76)
C94 "Cap" CC1608-0603 6720,6260 r270 top (schematic designator C68)
C95 "Cap" CC1608-0603 6730,6790 r270 top (schematic designator C63)
C96 "" PanasonicE 6900,4560 r90 top (schematic designator C74)
C97 "low ESR" PanasonicE 7160,5780 r270 top (schematic designator C65)
C98 "" TC3528-1411 7220,4440 r180 top (schematic designator C33)
C99 "low ESR" TC3528-1411 7230,5450 r90 top (schematic designator C66)
C100 "Cap" CC1608-0603 2780,3110 r180 bottom (schematic designator C52)
C101 "Cap" CC1608-0603 2780,3330 r180 bottom (schematic designator C48)
C102 "Cap" CC1608-0603 2780,3500 r180 bottom (schematic designator C52)
C103 "Cap" CC1608-0603 2780,3720 r180 bottom (schematic designator C48)
C104 "Cap" CC1608-0603 2780,3890 r180 bottom (schematic designator C52)
C105 "Cap" CC1608-0603 2780,4110 r180 bottom (schematic designator C48)
C106 "Cap" CC1608-0603 2780,4280 r180 bottom (schematic designator C52)
C107 "Cap" CC1608-0603 2780,4500 r180 bottom (schematic designator C48)
C108 "Cap" CC1608-0603 2780,5450 r180 bottom (schematic designator C52)
C109 "Cap" CC1608-0603 2780,5670 r180 bottom (schematic designator C48)
C110 "Cap" CC1608-0603 2780,5840 r180 bottom (schematic designator C52)
C111 "Cap" CC1608-0603 2780,6060 r180 bottom (schematic designator C48)
C112 "Cap" CC1608-0603 2780,6230 r180 bottom (schematic designator C52)
C113 "Cap" CC1608-0603 2780,6450 r180 bottom (schematic designator C48)
C114 "Cap" CC1608-0603 2780,6620 r180 bottom (schematic designator C52)
C115 "Cap" CC1608-0603 2780,6840 r180 bottom (schematic designator C48)
C116 "Cap" CC1608-0603 3160,3350 r0 bottom (schematic designator C51)
C117 "Cap" CC1608-0603 3160,3740 r0 bottom (schematic designator C51)
C118 "Cap" CC1608-0603 3160,4130 r0 bottom (schematic designator C51)
C119 "Cap" CC1608-0603 3160,4520 r0 bottom (schematic designator C51)
C120 "Cap" CC1608-0603 3160,5690 r0 bottom (schematic designator C51)
C121 "Cap" CC1608-0603 3160,6080 r0 bottom (schematic designator C51)
C122 "Cap" CC1608-0603 3160,6470 r0 bottom (schematic designator C51)
C123 "Cap" CC1608-0603 3160,6860 r0 bottom (schematic designator C51)
C124 "Cap" CC1608-0603 3300,3110 r0 bottom (schematic designator C49)
C125 "Cap" CC1608-0603 3300,3500 r0 bottom (schematic designator C49)
C126 "Cap" CC1608-0603 3300,3890 r0 bottom (schematic designator C49)
C127 "Cap" CC1608-0603 3300,4280 r0 bottom (schematic designator C49)
C128 "Cap" CC1608-0603 3300,5450 r0 bottom (schematic designator C49)
C129 "Cap" CC1608-0603 3300,5840 r0 bottom (schematic designator C49)
C130 "Cap" CC1608-0603 3300,6230 r0 bottom (schematic designator C49)
C131 "Cap" CC1608-0603 3300,6620 r0 bottom (schematic designator C49)
C132 "Cap" CC1608-0603 3500,3330 r0 bottom (schematic designator C34)
C133 "Cap" CC1608-0603 3500,3720 r0 bottom (schematic designator C34)
C134 "Cap" CC1608-0603 3500,4110 r0 bottom (schematic designator C34)
C135 "Cap" CC1608-0603 3500,4500 r0 bottom (schematic designator C34)
C136 "Cap" CC1608-0603 3500,4890 r0 bottom (schematic designator C34)
C137 "Cap" CC1608-0603 3500,5280 r0 bottom (schematic designator C34)
C138 "Cap" CC1608-0603 3500,5670 r0 bottom (schematic designator C34)
C139 "Cap" CC1608-0603 3500,6060 r0 bottom (schematic designator C34)
C140 "Cap" CC1608-0603 3500,6450 r0 bottom (schematic designator C34)
C141 "Cap" CC1608-0603 3500,6840 r0 bottom (schematic designator C34)
C142 "Cap" CC1608-0603 3540,3150 r90 bottom (schematic designator C36)
C143 "Cap" CC1608-0603 3540,3540 r90 bottom (schematic designator C36)
C144 "Cap" CC1608-0603 3540,3930 r90 bottom (schematic designator C36)
C145 "Cap" CC1608-0603 3540,4320 r90 bottom (schematic designator C36)
C146 "Cap" CC1608-0603 3540,4710 r90 bottom (schematic designator C36)
C147 "Cap" CC1608-0603 3540,5100 r90 bottom (schematic designator C36)
C148 "Cap" CC1608-0603 3540,5490 r90 bottom (schematic designator C36)
C149 "Cap" CC1608-0603 3540,5880 r90 bottom (schematic designator C36)
C150 "Cap" CC1608-0603 3540,6270 r90 bottom (schematic designator C36)
C151 "Cap" CC1608-0603 3540,6660 r90 bottom (schematic designator C36)
C152 "Cap" CC1608-0603 3760,3330 r180 bottom (schematic designator C35)
C153 "Cap" CC1608-0603 3760,3720 r180 bottom (schematic designator C35)
C154 "Cap" CC1608-0603 3760,4110 r180 bottom (schematic designator C35)
C155 "Cap" CC1608-0603 3760,4500 r180 bottom (schematic designator C35)
C156 "Cap" CC1608-0603 3760,4890 r180 bottom (schematic designator C35)
C157 "Cap" CC1608-0603 3760,5280 r180 bottom (schematic designator C35)
C158 "Cap" CC1608-0603 3760,5670 r180 bottom (schematic designator C35)
C159 "Cap" CC1608-0603 3760,6060 r180 bottom (schematic designator C35)
C160 "Cap" CC1608-0603 3760,6450 r180 bottom (schematic designator C35)
C161 "Cap" CC1608-0603 3760,6840 r180 bottom (schematic designator C35)
C162 "Cap" CC1608-0603 4020,3150 r0 bottom (schematic designator C37)
C163 "Cap" CC1608-0603 4020,3540 r0 bottom (schematic designator C37)
C164 "Cap" CC1608-0603 4020,3930 r0 bottom (schematic designator C37)
C165 "Cap" CC1608-0603 4020,4320 r0 bottom (schematic designator C37)
C166 "Cap" CC1608-0603 4020,4710 r0 bottom (schematic designator C37)
C167 "Cap" CC1608-0603 4020,5100 r0 bottom (schematic designator C37)
C168 "Cap" CC1608-0603 4020,5490 r0 bottom (schematic designator C37)
C169 "Cap" CC1608-0603 4020,5880 r0 bottom (schematic designator C37)
C170 "Cap" CC1608-0603 4020,6270 r0 bottom (schematic designator C37)
C171 "Cap" CC1608-0603 4020,6660 r0 bottom (schematic designator C37)
C172 "Cap" CC1608-0603 4800,3150 r180 bottom (schematic designator C46)
C173 "Cap" CC1608-0603 4800,3540 r180 bottom (schematic designator C46)
C174 "Cap" CC1608-0603 4800,3930 r180 bottom (schematic designator C46)
C175 "Cap" CC1608-0603 4800,4320 r180 bottom (schematic designator C46)
C176 "Cap" CC1608-0603 4800,4710 r180 bottom (schematic designator C46)
C177 "Cap" CC1608-0603 4800,5100 r180 bottom (schematic designator C46)
C178 "Cap" CC1608-0603 4800,5490 r180 bottom (schematic designator C46)
C179 "Cap" CC1608-0603 4800,5880 r180 bottom (schematic designator C46)
C180 "Cap" CC1608-0603 4800,6270 r180 bottom (schematic designator C46)
C181 "Cap" CC1608-0603 4800,6660 r180 bottom (schematic designator C46)
C182 "Cap" CC1608-0603 4880,3390 r0 bottom (schematic designator C43)
C183 "Cap" CC1608-0603 4880,3780 r0 bottom (schematic designator C43)
C184 "Cap" CC1608-0603 4880,4170 r0 bottom (schematic designator C43)
C185 "Cap" CC1608-0603 4880,4560 r0 bottom (schematic designator C43)
C186 "Cap" CC1608-0603 4880,4950 r0 bottom (schematic designator C43)
C187 "Cap" CC1608-0603 4880,5340 r0 bottom (schematic designator C43)
C188 "Cap" CC1608-0603 4880,5730 r0 bottom (schematic designator C43)
C189 "Cap" CC1608-0603 4880,6120 r0 bottom (schematic designator C43)
C190 "Cap" CC1608-0603 4880,6510 r0 bottom (schematic designator C43)
C191 "Cap" CC1608-0603 4880,6900 r0 bottom (schematic designator C43)
C192 "Cap" CC1608-0603 5420,3160 r90 bottom (schematic designator C45)
C193 "Cap" CC1608-0603 5460,3310 r0 bottom (schematic designator C41)
C194 "Cap" CC1608-0603 5420,3550 r90 bottom (schematic designator C45)
C195 "Cap" CC1608-0603 5460,3700 r0 bottom (schematic designator C41)
C196 "Cap" CC1608-0603 5420,3940 r90 bottom (schematic designator C45)
C197 "Cap" CC1608-0603 5460,4090 r0 bottom (schematic designator C41)
C198 "Cap" CC1608-0603 5420,4330 r90 bottom (schematic designator C45)
C199 "Cap" CC1608-0603 5460,4480 r0 bottom (schematic designator C41)
C200 "Cap" CC1608-0603 5420,4720 r90 bottom (schematic designator C45)
C201 "Cap" CC1608-0603 5460,4870 r0 bottom (schematic designator C41)
C202 "Cap" CC1608-0603 5420,5110 r90 bottom (schematic designator C45)
C203 "Cap" CC1608-0603 5460,5260 r0 bottom (schematic designator C41)
C204 "Cap" CC1608-0603 5420,5500 r90 bottom (schematic designator C45)
C205 "Cap" CC1608-0603 5460,5650 r0 bottom (schematic designator C41)
C206 "Cap" CC1608-0603 5420,5890 r90 bottom (schematic designator C45)
C207 "Cap" CC1608-0603 5460,6040 r0 bottom (schematic designator C41)
C208 "Cap" CC1608-0603 5420,6280 r90 bottom (schematic designator C45)
C209 "Cap" CC1608-0603 5460,6430 r0 bottom (schematic designator C41)
C210 "Cap" CC1608-0603 5420,6670 r90 bottom (schematic designator C45)
C211 "Cap" CC1608-0603 5460,6820 r0 bottom (schematic designator C41)
C212 "Cap" CC1608-0603 6460,3600 r270 bottom (schematic designator C58)
C213 "Cap" CC1608-0603 6460,4840 r90 bottom (schematic designator C56)
C214 "Cap" CC1608-0603 6460,5480 r270 bottom (schematic designator C53)
C215 "Cap" CC1608-0603 6660,3600 r270 bottom (schematic designator C59)
C216 "Cap" CC1608-0603 6680,3232 r270 bottom (schematic designator C60)
C217 "Cap" CC1608-0603 6680,4840 r90 bottom (schematic designator C57)
C218 "Cap" CC1608-0603 6680,5480 r90 bottom (schematic designator C54)
C219 "Cap" CC1608-0603 6820,3500 r270 bottom (schematic designator C24)
C220 "Cap" CC1608-0603 6860,4260 r180 bottom (schematic designator C22)
C221 "Cap" CC1608-0603 6940,3700 r270 bottom (schematic designator C13)
C222 "Cap" CC1608-0603 6940,3860 r90 bottom (schematic designator C23)
C223 "Cap" CC1608-0603 6960,4020 r90 bottom (schematic designator C14)
C224 "Cap" CC1608-0603 6952,5160 r0 bottom (schematic designator C7)
C225 "Cap" CC1608-0603 7200,3460 r270 bottom (schematic designator C25)
C226 "Cap" CC1608-0603 7260,4320 r180 bottom (schematic designator C21)
C227 "Cap" CC1608-0603 7220,4680 r0 bottom (schematic designator C8)
C228 "Cap" CC1608-0603 7320,3560 r0 bottom (schematic designator C12)
C229 "Cap" CC1608-0603 7280,4200 r180 bottom (schematic designator C9)
C230 "Cap" CC1608-0603 7440,3220 r90 bottom (schematic designator C6)
C231 "Cap" CC1608-0603 7400,4860 r270 bottom (schematic designator C29)
C232 "Cap" CC1608-0603 7560,3700 r270 bottom (schematic designator C11)
C233 "Cap" CC1608-0603 7560,4000 r90 bottom (schematic designator C10)
C234 "Cap" CC1608-0603 7600,3460 r270 bottom (schematic designator C26)
C235 "Cap" CC1608-0603 7680,3880 r0 bottom (schematic designator C19)
C236 "Cap" CC1608-0603 7680,4200 r0 bottom (schematic designator C20)
JP1 "Header 10X2H" HDR2X10 2100,5455 r270 top (schematic designator JP3)
JP2 "Header 3X2" HDR2X3 7900,3580 r90 top
JP3 "Header 3X2" HDR2X3 7900,4020 r90 top (schematic designator JP1)
L1 "Inductor 28F0121-1SR" STEWARD_1SR 7060,6200 r180 top
L2 "Ferrite" C3216-1206 6900,6440 r180 top (schematic designator L3)
L3 "Inductor 28F0121-1SR" STEWARD_1SR 7080,6680 r180 top (schematic designator L2)
O1 "OSC" SG636PCE 7540,3320 r270 top
O2 "HFBR-1528" HPVL 7580,4580 r90 top
O3 "HFBR-2528" HPVL 7580,4980 r90 top
POWER-A1 "Header 4" MJ4RTHR 7400,6440 r90 top (schematic designator JP5)
POWER-D1 "Header 4" MJ4RTHR 7400,5660 r90 top (schematic designator JP4)
R1 "0.5%" R2012-0805 2500,3250 r270 top (schematic designator R18)
R2 "0.5%" R2012-0805 2500,3640 r270 top (schematic designator R18)
R3 "0.5%" R2012-0805 2500,4030 r270 top (schematic designator R18)
R4 "0.5%" R2012-0805 2500,4420 r270 top (schematic designator R18)
R5 "0.5%" R2012-0805 2500,5590 r270 top (schematic designator R18)
R6 "0.5%" R2012-0805 2500,5980 r270 top (schematic designator R18)
R7 "0.5%" R2012-0805 2500,6370 r270 top (schematic designator R18)
R8 "0.5%" R2012-0805 2500,6760 r270 top (schematic designator R18)
R9 "Res1" R2012-0805 2980,3290 r0 top (schematic designator R17)
R10 "Res1" R2012-0805 2980,3680 r0 top (schematic designator R17)
R11 "Res1" R2012-0805 2980,4070 r0 top (schematic designator R17)
R12 "Res1" R2012-0805 2980,4460 r0 top (schematic designator R17)
R13 "Res1" R2012-0805 2980,5630 r0 top (schematic designator R17)
R14 "Res1" R2012-0805 2980,6020 r0 top (schematic designator R17)
R15 "Res1" R2012-0805 2980,6410 r0 top (schematic designator R17)
R16 "Res1" R2012-0805 2980,6800 r0 top (schematic designator R17)
R17 "Res1" R2012-0805 4440,3150 r90 top (schematic designator R11)
R18 "Res1" R2012-0805 4460,3330 r270 top (schematic designator R15)
R19 "Res1" R2012-0805 4440,3540 r90 top (schematic designator R11)
R20 "Res1" R2012-0805 4460,3720 r270 top (schematic designator R15)
R21 "Res1" R2012-0805 4440,3930 r90 top (schematic designator R11)
R22 "Res1" R2012-0805 4460,4110 r270 top (schematic designator R15)
R23 "Res1" R2012-0805 4440,4320 r90 top (schematic designator R11)
R24 "Res1" R2012-0805 4460,4500 r270 top (schematic designator R15)
R25 "Res1" R2012-0805 4440,4710 r90 top (schematic designator R11)
R26 "Res1" R2012-0805 4460,4890 r270 top (schematic designator R15)
R27 "Res1" R2012-0805 4440,5100 r90 top (schematic designator R11)
R28 "Res1" R2012-0805 4460,5280 r270 top (schematic designator R15)
R29 "Res1" R2012-0805 4440,5490 r90 top (schematic designator R11)
R30 "Res1" R2012-0805 4460,5670 r270 top (schematic designator R15)
R31 "Res1" R2012-0805 4440,5880 r90 top (schematic designator R11)
R32 "Res1" R2012-0805 4460,6060 r270 top (schematic designator R15)
R33 "Res1" R2012-0805 4440,6270 r90 top (schematic designator R11)
R34 "Res1" R2012-0805 4460,6450 r270 top (schematic designator R15)
R35 "Res1" R2012-0805 4440,6660 r90 top (schematic designator R11)
R36 "Res1" R2012-0805 4460,6840 r270 top (schematic designator R15)
R37 "Res1" R2012-0805 4620,3110 r0 top (schematic designator R16)
R38 "Res1" R2012-0805 4560,3330 r270 top (schematic designator R13)
R39 "Res1" R2012-0805 4620,3500 r0 top (schematic designator R16)
R40 "Res1" R2012-0805 4560,3720 r270 top (schematic designator R13)
R41 "Res1" R2012-0805 4620,3890 r0 top (schematic designator R16)
R42 "Res1" R2012-0805 4560,4110 r270 top (schematic designator R13)
R43 "Res1" R2012-0805 4620,4280 r0 top (schematic designator R16)
R44 "Res1" R2012-0805 4560,4500 r270 top (schematic designator R13)
R45 "Res1" R2012-0805 4620,4670 r0 top (schematic designator R16)
R46 "Res1" R2012-0805 4560,4890 r270 top (schematic designator R13)
R47 "Res1" R2012-0805 4620,5060 r0 top (schematic designator R16)
R48 "Res1" R2012-0805 4560,5280 r270 top (schematic designator R13)
R49 "Res1" R2012-0805 4620,5450 r0 top (schematic designator R16)
R50 "Res1" R2012-0805 4560,5670 r270 top (schematic designator R13)
R51 "Res1" R2012-0805 4620,5840 r0 top (schematic designator R16)
R52 "Res1" R2012-0805 4560,6060 r270 top (schematic designator R13)
R53 "Res1" R2012-0805 4620,6230 r0 top (schematic designator R16)
R54 "Res1" R2012-0805 4560,6450 r270 top (schematic designator R13)
R55 "Res1" R2012-0805 4620,6620 r0 top (schematic designator R16)
R56 "Res1" R2012-0805 4560,6840 r270 top (schematic designator R13)
R57 "Res1" R2012-0805 5040,3250 r270 top (schematic designator R14)
R58 "Res1" R2012-0805 5040,3640 r270 top (schematic designator R14)
R59 "Res1" R2012-0805 5040,4030 r270 top (schematic designator R14)
R60 "Res1" R2012-0805 5040,4420 r270 top (schematic designator R14)
R61 "Res1" R2012-0805 5040,4810 r270 top (schematic designator R14)
R62 "Res1" R2012-0805 5040,5200 r270 top (schematic designator R14)
R63 "Res1" R2012-0805 5040,5590 r270 top (schematic designator R14)
R64 "Res1" R2012-0805 5040,5980 r270 top (schematic designator R14)
R65 "Res1" R2012-0805 5040,6370 r270 top (schematic designator R14)
R66 "Res1" R2012-0805 5040,6760 r270 top (schematic designator R14)
R67 "Res1" R2012-0805 5140,3310 r270 top (schematic designator R12)
R68 "Res1" R2012-0805 5140,3700 r270 top (schematic designator R12)
R69 "Res1" R2012-0805 5140,4090 r270 top (schematic designator R12)
R70 "Res1" R2012-0805 5140,4480 r270 top (schematic designator R12)
R71 "Res1" R2012-0805 5140,4870 r270 top (schematic designator R12)
R72 "Res1" R2012-0805 5140,5260 r270 top (schematic designator R12)
R73 "Res1" R2012-0805 5140,5650 r270 top (schematic designator R12)
R74 "Res1" R2012-0805 5140,6040 r270 top (schematic designator R12)
R75 "Res1" R2012-0805 5140,6430 r270 top (schematic designator R12)
R76 "Res1" R2012-0805 5140,6820 r270 top (schematic designator R12)
R77 "Res1" R2012-0805 5240,3310 r270 top (schematic designator R9)
R78 "Res1" R2012-0805 5240,3700 r270 top (schematic designator R9)
R79 "Res1" R2012-0805 5240,4090 r270 top (schematic designator R9)
R80 "Res1" R2012-0805 5240,4480 r270 top (schematic designator R9)
R81 "Res1" R2012-0805 5240,4870 r270 top (schematic designator R9)
R82 "Res1" R2012-0805 5240,5260 r270 top (schematic designator R9)
R83 "Res1" R2012-0805 5240,5650 r270 top (schematic designator R9)
R84 "Res1" R2012-0805 5240,6040 r270 top (schematic designator R9)
R85 "Res1" R2012-0805 5240,6430 r270 top (schematic designator R9)
R86 "Res1" R2012-0805 5240,6820 r270 top (schematic designator R9)
R87 "Res1" R2012-0805 5340,3150 r270 top (schematic designator R8)
R88 "Res1" R2012-0805 5340,3330 r90 top (schematic designator R10)
R89 "Res1" R2012-0805 5340,3540 r270 top (schematic designator R8)
R90 "Res1" R2012-0805 5340,3720 r90 top (schematic designator R10)
R91 "Res1" R2012-0805 5340,3930 r270 top (schematic designator R8)
R92 "Res1" R2012-0805 5340,4110 r90 top (schematic designator R10)
R93 "Res1" R2012-0805 5340,4320 r270 top (schematic designator R8)
R94 "Res1" R2012-0805 5340,4500 r90 top (schematic designator R10)
R95 "Res1" R2012-0805 5340,4710 r270 top (schematic designator R8)
R96 "Res1" R2012-0805 5340,4890 r90 top (schematic designator R10)
R97 "Res1" R2012-0805 5340,5100 r270 top (schematic designator R8)
R98 "Res1" R2012-0805 5340,5280 r90 top (schematic designator R10)
R99 "Res1" R2012-0805 5340,5490 r270 top (schematic designator R8)
R100 "Res1" R2012-0805 5340,5670 r90 top (schematic designator R10)
R101 "Res1" R2012-0805 5340,5880 r270 top (schematic designator R8)
R102 "Res1" R2012-0805 5340,6060 r90 top (schematic designator R10)
R103 "Res1" R2012-0805 5340,6270 r270 top (schematic designator R8)
R104 "Res1" R2012-0805 5340,6450 r90 top (schematic designator R10)
R105 "Res1" R2012-0805 5340,6660 r270 top (schematic designator R8)
R106 "Res1" R2012-0805 5340,6840 r90 top (schematic designator R10)
R107 "Res1" R2012-0805 5740,3600 r90 top (schematic designator R1)
R108 "Res1" R2012-0805 5740,4380 r90 top (schematic designator R1)
R109 "Res1" R2012-0805 5740,5160 r90 top (schematic designator R1)
R110 "Res1" R2012-0805 5740,6720 r90 top (schematic designator R1)
R111 "Res1" R2012-0805 5760,5960 r90 top (schematic designator R1)
R112 "Res1" C3216-1206 6660,6440 r180 top (schematic designator R19)
R113 "Res1" R2012-0805 7400,4460 r270 top (schematic designator R5)
R114 "Res1" R2012-0805 7300,5020 r90 top (schematic designator R2)
R115 "Res1" R2012-0805 7300,5200 r90 top (schematic designator R3)
R116 "Res1" R2012-0805 7400,4660 r270 top (schematic designator R4)
R117 "Res1" R2012-0805 7400,4860 r90 top (schematic designator R7)
R118 "Res1" R2012-0805 7400,5060 r90 top (schematic designator R6)
R119 "Res1" R2012-0805 7830,3390 r90 top (schematic designator R20)
U1 "AD8221" SO-G8 2720,3250 r270 top (schematic designator U11)
U2 "AD8221" SO-G8 2720,3640 r270 top (schematic designator U11)
U3 "AD8221" SO-G8 2720,4030 r270 top (schematic designator U11)
U4 "AD8221" SO-G8 2720,4420 r270 top (schematic designator U11)
U5 "AD8221" SO-G8 2720,5590 r270 top (schematic designator U11)
U6 "AD8221" SO-G8 2720,5980 r270 top (schematic designator U11)
U7 "AD8221" SO-G8 2720,6370 r270 top (schematic designator U11)
U8 "AD8221" SO-G8 2720,6760 r270 top (schematic designator U11)
u9 "ADG604" SSO-G14/X.4 2980,5180 r90 top (schematic designator u10)
u10 "ADG604" SSO-G14/X.4 2980,4820 r90 top
U11 "" SO-G8/D5.1 3220,3230 r180 top (schematic designator U12)
U12 "" SO-G8/D5.1 3220,3620 r180 top
U13 "" SO-G8/D5.1 3220,4010 r180 top (schematic designator U12)
U14 "" SO-G8/D5.1 3220,4400 r180 top (schematic designator U12)
U15 "" SO-G8/D5.1 3220,5570 r180 top (schematic designator U12)
U16 "" SO-G8/D5.1 3220,5960 r180 top (schematic designator U12)
U17 "" SO-G8/D5.1 3220,6350 r180 top (schematic designator U12)
U18 "" SO-G8/D5.1 3220,6740 r180 top (schematic designator U12)
U19 "LTC6910-2" TSOT-23-8 3460,3190 r90 top (schematic designator U6)
U20 "LTC6910-2" TSOT-23-8 3460,3580 r90 top (schematic designator U6)
U21 "LTC6910-2" TSOT-23-8 3460,3970 r90 top (schematic designator U6)
U22 "LTC6910-2" TSOT-23-8 3460,4360 r90 top (schematic designator U6)
U23 "LTC6910-2" TSOT-23-8 3460,4750 r90 top (schematic designator U6)
U24 "LTC6910-2" TSOT-23-8 3460,5140 r90 top (schematic designator U6)
U25 "LTC6910-2" TSOT-23-8 3460,5530 r90 top (schematic designator U6)
U26 "LTC6910-2" TSOT-23-8 3460,5920 r90 top (schematic designator U6)
U27 "LTC6910-2" TSOT-23-8 3460,6310 r90 top (schematic designator U6)
U28 "LTC6910-2" TSOT-23-8 3460,6700 r90 top (schematic designator U6)
U29 "LTC6910-3" TSOT-23-8 3840,5140 r90 top (schematic designator U7)
U30 "LTC6910-3" TSOT-23-8 3840,3190 r90 top (schematic designator U7)
U31 "LTC6910-3" TSOT-23-8 3840,3580 r90 top (schematic designator U7)
U32 "LTC6910-3" TSOT-23-8 3840,3970 r90 top (schematic designator U7)
U33 "LTC6910-3" TSOT-23-8 3840,4360 r90 top (schematic designator U7)
U34 "LTC6910-3" TSOT-23-8 3840,4750 r90 top (schematic designator U7)
U35 "LTC6910-3" TSOT-23-8 3840,5530 r90 top (schematic designator U7)
U36 "LTC6910-3" TSOT-23-8 3840,5920 r90 top (schematic designator U7)
U37 "LTC6910-3" TSOT-23-8 3840,6310 r90 top (schematic designator U7)
U38 "LTC6910-3" TSOT-23-8 3840,6700 r90 top (schematic designator U7)
U39 "" SSO-G16/X.4 4200,3290 r270 top (schematic designator U19)
U40 "" SSO-G16/X.4 4200,3680 r270 top (schematic designator U19)
U41 "" SSO-G16/X.4 4200,4070 r270 top (schematic designator U19)
U42 "" SSO-G16/X.4 4200,4460 r270 top (schematic designator U19)
U43 "" SSO-G16/X.4 4200,4850 r270 top (schematic designator U19)
U44 "" SSO-G16/X.4 4200,5240 r270 top (schematic designator U19)
U45 "" SSO-G16/X.4 4200,5630 r270 top (schematic designator U19)
U46 "" SSO-G16/X.4 4200,6020 r270 top (schematic designator U19)
U47 "" SSO-G16/X.4 4200,6410 r270 top (schematic designator U19)
U48 "" SSO-G16/X.4 4200,6800 r270 top (schematic designator U19)
U49 "LTC1653-3" SSO-G16/X.4 4800,3270 r270 top (schematic designator U9)
U50 "LTC1653-3" SSO-G16/X.4 4800,3660 r270 top (schematic designator U9)
U51 "LTC1653-3" SSO-G16/X.4 4800,4050 r270 top (schematic designator U9)
U52 "LTC1653-3" SSO-G16/X.4 4800,4440 r270 top (schematic designator U9)
U53 "LTC1653-3" SSO-G16/X.4 4800,4830 r270 top (schematic designator U9)
U54 "LTC1653-3" SSO-G16/X.4 4800,5220 r270 top (schematic designator U9)
U55 "LTC1653-3" SSO-G16/X.4 4800,5610 r270 top (schematic designator U9)
U56 "LTC1653-3" SSO-G16/X.4 4800,6000 r270 top (schematic designator U9)
U57 "LTC1653-3" SSO-G16/X.4 4800,6390 r270 top (schematic designator U9)
U58 "LTC1653-3" SSO-G16/X.4 4800,6780 r270 top (schematic designator U9)
U59 "AD8021ARM" TSSO3X5-G8/X.4 5520,3280 r270 top (schematic designator U8)
U60 "AD8021ARM" TSSO3X5-G8/X.4 5520,3670 r270 top (schematic designator U8)
U61 "AD8021ARM" TSSO3X5-G8/X.4 5520,4060 r270 top (schematic designator U8)
U62 "AD8021ARM" TSSO3X5-G8/X.4 5520,4450 r270 top (schematic designator U8)
U63 "AD8021ARM" TSSO3X5-G8/X.4 5520,4840 r270 top (schematic designator U8)
U64 "AD8021ARM" TSSO3X5-G8/X.4 5520,5230 r270 top (schematic designator U8)
U65 "AD8021ARM" TSSO3X5-G8/X.4 5520,5620 r270 top (schematic designator U8)
U66 "AD8021ARM" TSSO3X5-G8/X.4 5520,6010 r270 top (schematic designator U8)
U67 "AD8021ARM" TSSO3X5-G8/X.4 5520,6400 r270 top (schematic designator U8)
U68 "AD8021ARM" TSSO3X5-G8/X.4 5520,6790 r270 top (schematic designator U8)
U69 "" F-QFP7X7-G48/X.3N 6090,3410 r90 top (schematic designator U1)
U70 "" F-QFP7X7-G48/X.3N 6090,4190 r90 top (schematic designator U1)
U71 "" F-QFP7X7-G48/X.3N 6090,4970 r90 top (schematic designator U1)
U72 "" F-QFP7X7-G48/X.3N 6090,5750 r90 top (schematic designator U1)
U73 "" F-QFP7X7-G48/X.3N 6090,6530 r90 top (schematic designator U1)
U74 "" SO-G16/D10 6560,3760 r90 top (schematic designator U14)
U75 "" SO-G16/D10 6570,4700 r270 top (schematic designator U15)
U76 "" SO-G16/D10 6570,5340 r270 top (schematic designator U13)
U77 "LT1790ACS6-1.25" "LTI SOT-23 ThinSOT" 6560,6200 r90 top (schematic designator U18)
U78 "LT1790ACS6-2.5" "LTI SOT-23 ThinSOT" 6570,6730 r90 top (schematic designator U17)
U79 "TPS77518D" SO-G8 6780,3220 r270 top (schematic designator U20)
U80 "XC17S00A" DIP-8 7020,5100 r0 top (schematic designator U4)
U81 "XC2S50E-5TQ144C" F-QFP20x20-G144/N 7260,3880 r90 top locked (schematic designator U2)
U82 "TPS77533D" SO-G8 6990,5450 r270 top (schematic designator U16)
U83 "24LC32A/SN" SO-G8/E2.5 7060,3220 r0 top (schematic designator U3)
U84 "SN75451BD" SO-G8/E2.5 7220,4680 r0 top (schematic designator U5)

## Footprints (in the part's own frame and the unit in brackets; to place one, negate y for a bottom-side part, rotate by r counter-clockwise, add the part's x,y. Pads: shape width x height; smd on the part's side, far side on the other; paste and mask are expansions set on the pad)
C3216-1206 [mm]
  rect 1.6x1.8 smd: 1(-1.4,0) 2(1.4,0)
  silkscreen extent -2.6,-1.3 2.6,1.3
CC1608-0603 [mm]
  rect 1.1x1 smd: 1(-0.85,0) 2(0.85,0)
  silkscreen extent -1.8,-1.2 1.8,1.2
CC2013-0805 [mm]
  rect 1.15x1.4 smd: 1(-0.975,0) 2(0.975,0)
  silkscreen extent -1.95,-1.4 1.95,1.4
DIP-8 [mm]
  rect 1.5x1.5 hole 0.9: 1(-3.81,-3.81)
  round 1.5 hole 0.9: 2(-1.27,-3.81) 3(1.27,-3.81) 4(3.81,-3.81) 5(3.81,3.81) 6(1.27,3.81) 7(-1.27,3.81) 8(-3.81,3.81)
  silkscreen extent -5.15,-2.65 5.15,2.65
F-QFP7X7-G48/X.3N [mm]
  rect 1.6x0.3 smd: 1(-4.1,2.75) 2(-4.1,2.25) 3(-4.1,1.75) 4(-4.1,1.25) 5(-4.1,0.75) 6(-4.1,0.25) 7(-4.1,-0.25) 8(-4.1,-0.75) 9(-4.1,-1.25) 10(-4.1,-1.75) 11(-4.1,-2.25) 12(-4.1,-2.75) 25(4.1,-2.75) 26(4.1,-2.25) 27(4.1,-1.75) 28(4.1,-1.25) 29(4.1,-0.75) 30(4.1,-0.25) 31(4.1,0.25) 32(4.1,0.75) 33(4.1,1.25) 34(4.1,1.75) 35(4.1,2.25) 36(4.1,2.75)
  rect 0.3x1.6 smd: 13(-2.75,-4.1) 14(-2.25,-4.1) 15(-1.75,-4.1) 16(-1.25,-4.1) 17(-0.75,-4.1) 18(-0.25,-4.1) 19(0.25,-4.1) 20(0.75,-4.1) 21(1.25,-4.1) 22(1.75,-4.1) 23(2.25,-4.1) 24(2.75,-4.1) 37(2.75,4.1) 38(2.25,4.1) 39(1.75,4.1) 40(1.25,4.1) 41(0.75,4.1) 42(0.25,4.1) 43(-0.25,4.1) 44(-0.75,4.1) 45(-1.25,4.1) 46(-1.75,4.1) 47(-2.25,4.1) 48(-2.75,4.1)
  silkscreen extent -4.22,-2.9 2.9,3.57
F-QFP20x20-G144/N [mm]
  rect 1.6x0.3 smd: 1(-10.6,8.75) 2(-10.6,8.25) 3(-10.6,7.75) 4(-10.6,7.25) 5(-10.6,6.75) 6(-10.6,6.25) 7(-10.6,5.75) 8(-10.6,5.25) 9(-10.6,4.75) 10(-10.6,4.25) 11(-10.6,3.75) 12(-10.6,3.25) 13(-10.6,2.75) 14(-10.6,2.25) 15(-10.6,1.75) 16(-10.6,1.25) 17(-10.6,0.75) 18(-10.6,0.25) 19(-10.6,-0.25) 20(-10.6,-0.75) 21(-10.6,-1.25) 22(-10.6,-1.75) 23(-10.6,-2.25) 24(-10.6,-2.75) 25(-10.6,-3.25) 26(-10.6,-3.75) 27(-10.6,-4.25) 28(-10.6,-4.75) 29(-10.6,-5.25) 30(-10.6,-5.75) 31(-10.6,-6.25) 32(-10.6,-6.75) 33(-10.6,-7.25) 34(-10.6,-7.75) 35(-10.6,-8.25) 36(-10.6,-8.75) 73(10.6,-8.75) 74(10.6,-8.25) 75(10.6,-7.75) 76(10.6,-7.25) 77(10.6,-6.75) 78(10.6,-6.25) 79(10.6,-5.75) 80(10.6,-5.25) 81(10.6,-4.75) 82(10.6,-4.25) 83(10.6,-3.75) 84(10.6,-3.25) 85(10.6,-2.75) 86(10.6,-2.25) 87(10.6,-1.75) 88(10.6,-1.25) 89(10.6,-0.75) 90(10.6,-0.25) 91(10.6,0.25) 92(10.6,0.75) 93(10.6,1.25) 94(10.6,1.75) 95(10.6,2.25) 96(10.6,2.75) 97(10.6,3.25) 98(10.6,3.75) 99(10.6,4.25) 100(10.6,4.75) 101(10.6,5.25) 102(10.6,5.75) 103(10.6,6.25) 104(10.6,6.75) 105(10.6,7.25) 106(10.6,7.75) 107(10.6,8.25) 108(10.6,8.75)
  rect 0.3x1.6 smd: 37(-8.75,-10.6) 38(-8.25,-10.6) 39(-7.75,-10.6) 40(-7.25,-10.6) 41(-6.75,-10.6) 42(-6.25,-10.6) 43(-5.75,-10.6) 44(-5.25,-10.6) 45(-4.75,-10.6) 46(-4.25,-10.6) 47(-3.75,-10.6) 48(-3.25,-10.6) 49(-2.75,-10.6) 50(-2.25,-10.6) 51(-1.75,-10.6) 52(-1.25,-10.6) 53(-0.75,-10.6) 54(-0.25,-10.6) 55(0.25,-10.6) 56(0.75,-10.6) 57(1.25,-10.6) 58(1.75,-10.6) 59(2.25,-10.6) 60(2.75,-10.6) 61(3.25,-10.6) 62(3.75,-10.6) 63(4.25,-10.6) 64(4.75,-10.6) 65(5.25,-10.6) 66(5.75,-10.6) 67(6.25,-10.6) 68(6.75,-10.6) 69(7.25,-10.6) 70(7.75,-10.6) 71(8.25,-10.6) 72(8.75,-10.6) 109(8.75,10.6) 110(8.25,10.6) 111(7.75,10.6) 112(7.25,10.6) 113(6.75,10.6) 114(6.25,10.6) 115(5.75,10.6) 116(5.25,10.6) 117(4.75,10.6) 118(4.25,10.6) 119(3.75,10.6) 120(3.25,10.6) 121(2.75,10.6) 122(2.25,10.6) 123(1.75,10.6) 124(1.25,10.6) 125(0.75,10.6) 126(0.25,10.6) 127(-0.25,10.6) 128(-0.75,10.6) 129(-1.25,10.6) 130(-1.75,10.6) 131(-2.25,10.6) 132(-2.75,10.6) 133(-3.25,10.6) 134(-3.75,10.6) 135(-4.25,10.6) 136(-4.75,10.6) 137(-5.25,10.6) 138(-5.75,10.6) 139(-6.25,10.6) 140(-6.75,10.6) 141(-7.25,10.6) 142(-7.75,10.6) 143(-8.25,10.6) 144(-8.75,10.6)
  silkscreen extent -10.72,-9.4 9.4,9.57
HDR2X3 [mm]
  rect 1.5x1.5 hole 0.9: 1(0,0)
  round 1.5 hole 0.9: 2(0,2.54) 3(2.54,0) 4(2.54,2.54) 5(5.08,0) 6(5.08,2.54)
  silkscreen extent -1.27,-1.27 6.35,3.81
HDR2X10 [mm]
  rect 1.5x1.5 hole 0.9: 1(0,0)
  round 1.5 hole 0.9: 2(0,2.54) 3(2.54,0) 4(2.54,2.54) 5(5.08,0) 6(5.08,2.54) 7(7.62,0) 8(7.62,2.54) 9(10.16,0) 10(10.16,2.54) 11(12.7,0) 12(12.7,2.54) 13(15.24,0) 14(15.24,2.54) 15(17.78,0) 16(17.78,2.54) 17(20.32,0) 18(20.32,2.54) 19(22.86,0) 20(22.86,2.54)
  silkscreen extent -1.27,-1.27 24.13,3.81
HPVL [mil]
  round 60 hole 40: 1(150,0) 2(50,0) 3(-50,0) 4(-150,0) 5(-150,-300) 8(150,-300)
  silkscreen extent -200,-370 200,100
"LTI SOT-23 ThinSOT" [mm]
  rect 1x0.6 smd: 1(0,0) 2(0,-0.95) 3(0,-1.9) 4(2.8,-1.9) 5(2.8,-0.95) 6(2.8,0)
  silkscreen extent 0.84,-2.39 1.96,0.48
MJ4RTHR [mm]
  round 4 hole 3.2: 0(-8.4,-7.3) 0(4.2,-7.3)
  round 2.2 hole 1.8: 1(4.2,0) 2(0,0) 3(-4.2,0) 4(-8.4,0)
  silkscreen extent -11.1,-14.2 6.9,-1.9
PanasonicE [mm]
  rect 3.6x0.8 smd: 1(3,0) 2(-3,0)
  silkscreen extent -4.6,-4.1 4.6,4.2
R2012-0805 [mm]
  rect 1.3x1.5 smd: 1(-0.95,0) 2(0.95,0)
  silkscreen extent -2,-1.15 2,1.15
SG636PCE [mm]
  rect 2.3x1.5 smd: 1(0,0) 4(0,-5.08) 5(4.6,-5.08) 8(4.6,0)
  silkscreen extent 0,-8.64 4.57,3.05
SO-G8 [mm]
  rect 0.6x2.2 smd: 1(-1.905,-2.6) 2(-0.635,-2.6) 3(0.635,-2.6) 4(1.905,-2.6) 5(1.905,2.6) 6(0.635,2.6) 7(-0.635,2.6) 8(-1.905,2.6)
  silkscreen extent -2.88,-2.72 2.5,1.1
SO-G8/D5.1 [mm]
  rect 0.6x1.4 smd: 1(-1.905,-2.95) 2(-0.635,-2.95) 3(0.635,-2.95) 4(1.905,-2.95) 5(1.905,2.95) 6(0.635,2.95) 7(-0.635,2.95) 8(-1.905,2.95)
  silkscreen extent -2.88,-3.07 2.55,1.85
SO-G8/E2.5 [mm]
  rect 0.6x2.05 smd: 1(-1.905,-2.675) 2(-0.635,-2.675) 3(0.635,-2.675) 4(1.905,-2.675) 5(1.905,2.675) 6(0.635,2.675) 7(-0.635,2.675) 8(-1.905,2.675)
  silkscreen extent -2.88,-2.8 2.5,1.25
SO-G16/D10 [mm]
  rect 0.6x2.05 smd: 1(-4.445,-2.675) 2(-3.175,-2.675) 3(-1.905,-2.675) 4(-0.635,-2.675) 5(0.635,-2.675) 6(1.905,-2.675) 7(3.175,-2.675) 8(4.445,-2.675) 9(4.445,2.675) 10(3.175,2.675) 11(1.905,2.675) 12(0.635,2.675) 13(-0.635,2.675) 14(-1.905,2.675) 15(-3.175,2.675) 16(-4.445,2.675)
  silkscreen extent -5.42,-2.8 5,1.25
SSO-G14/X.4 [mm]
  rect 0.4x2.15 smd: 1(-1.95,-3.275) 2(-1.3,-3.275) 3(-0.65,-3.275) 4(0,-3.275) 5(0.65,-3.275) 6(1.3,-3.275) 7(1.95,-3.275) 8(1.95,3.275) 9(1.3,3.275) 10(0.65,3.275) 11(0,3.275) 12(-0.65,3.275) 13(-1.3,3.275) 14(-1.95,3.275)
  silkscreen extent -3.25,-3.4 3.25,1.8
SSO-G16/X.4 [mm]
  rect 0.4x2.15 smd: 1(-2.275,-3.275) 2(-1.625,-3.275) 3(-0.975,-3.275) 4(-0.325,-3.275) 5(0.325,-3.275) 6(0.975,-3.275) 7(1.625,-3.275) 8(2.275,-3.275) 9(2.275,3.275) 10(1.625,3.275) 11(0.975,3.275) 12(0.325,3.275) 13(-0.325,3.275) 14(-0.975,3.275) 15(-1.625,3.275) 16(-2.275,3.275)
  silkscreen extent -3.25,-3.4 3.25,1.8
STEWARD_1SR [mil]
  rect 124x136 smd: 1(-169,0) 2(169,0)
  silkscreen extent -263,-100 263,100
TC3216-1206 [mm]
  rect 2x1.2 smd: 1(-1.4,0) 2(1.4,0)
  silkscreen extent -2.8,-1 2.3,1